# EAGLE board cryptocape-panel-v02 (EAGLE 6.5.0), part 1 of 2
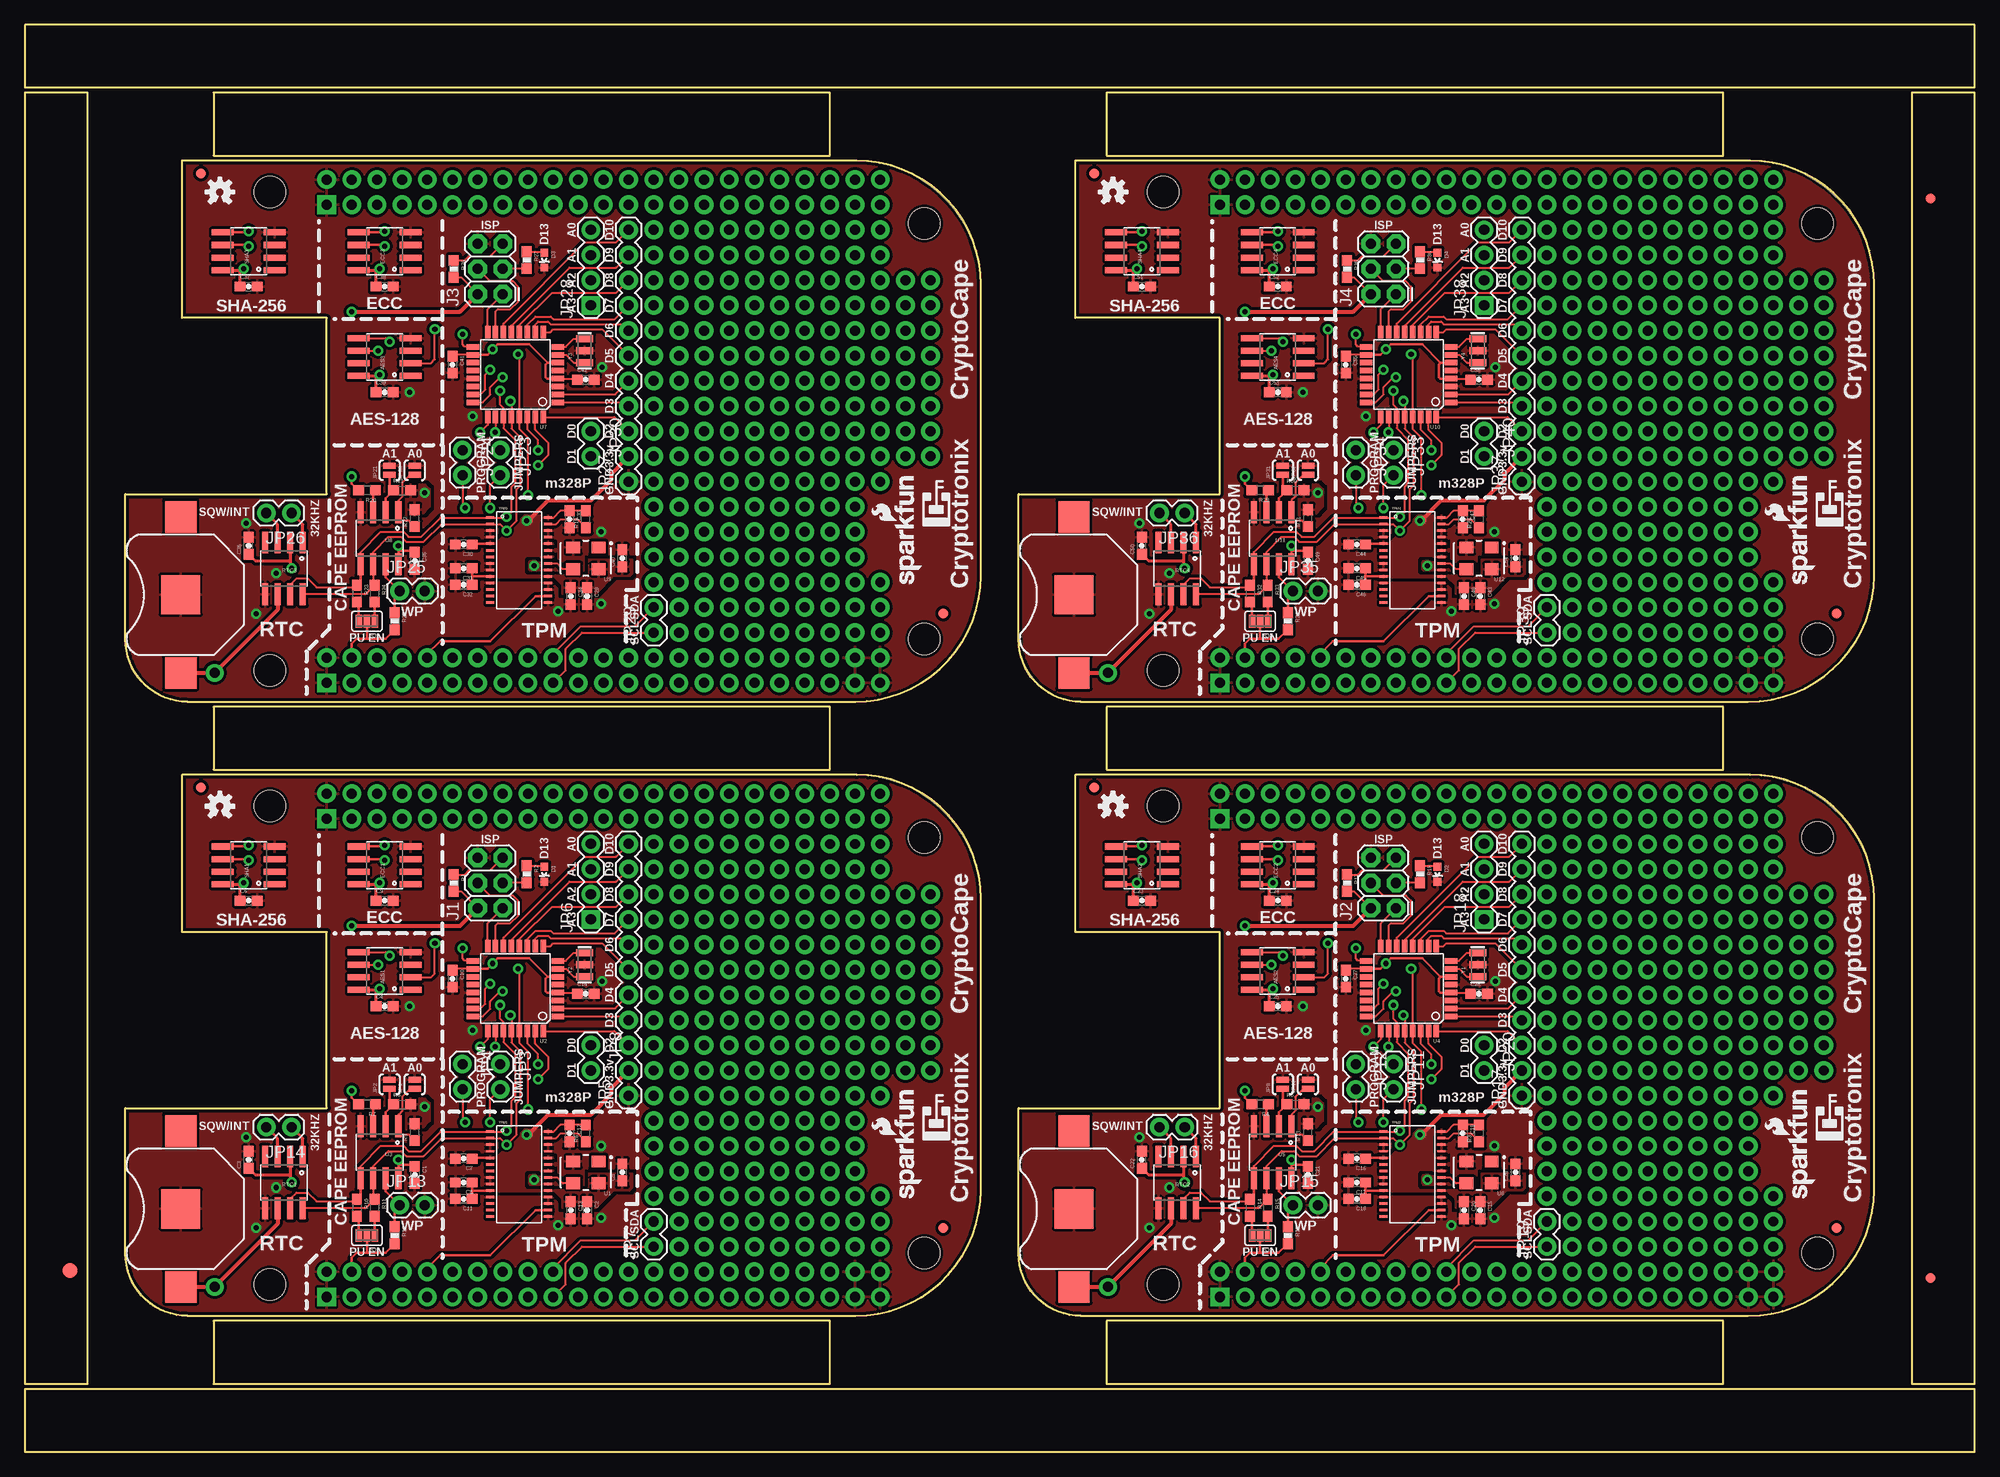
[diagram p0: board, top side]
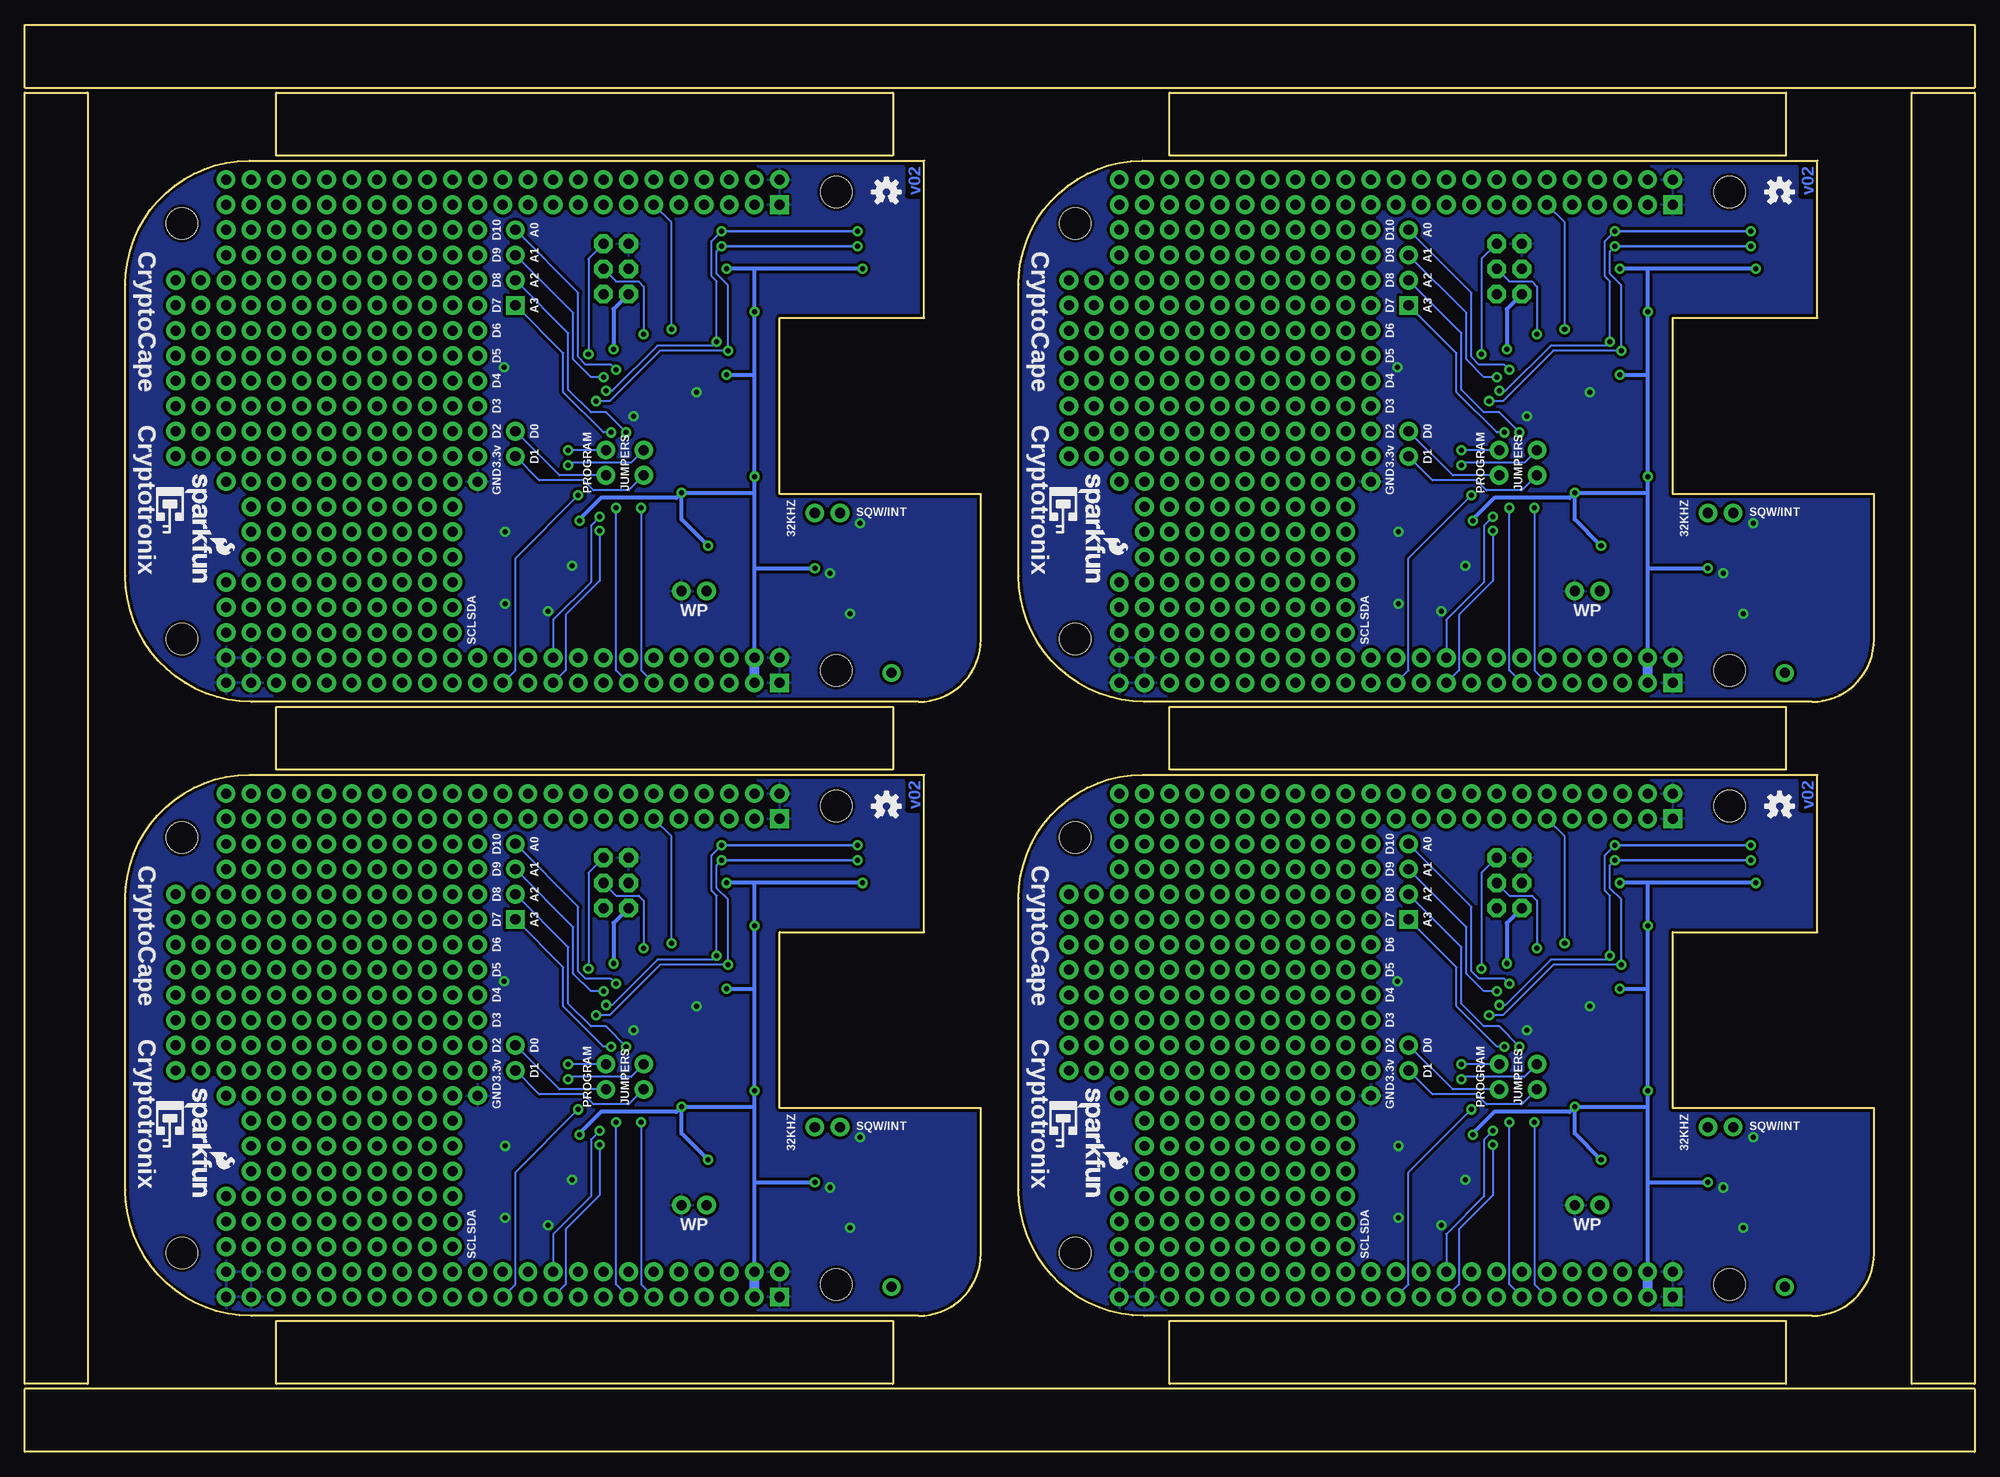
[diagram p1: board, bottom side, seen from below]

Size 196.85 x 144.02 mm. Coordinates in mm from the lower left corner, seen from the top.
Outline: 16.45,13.72 83.82,13.72 arc90 96.52,26.42 96.52,55.82 arc90 84.01,68.33 15.88,68.33 15.88,52.45 30.48,52.45 30.48,34.67 10.16,34.67 10.16,20 arc90 16.45,13.72
Outline: 19.05,6.86 81.28,6.86 81.28,13.21 19.05,13.21 19.05,6.86
Outline: 106.62,13.72 173.99,13.72 arc90 186.69,26.42 186.69,55.82 arc90 174.18,68.33 106.05,68.33 106.05,52.45 120.65,52.45 120.65,34.67 100.33,34.67 100.33,20 arc90 106.62,13.72
Outline: 109.22,6.86 171.45,6.86 171.45,13.21 109.22,13.21 109.22,6.86
Outline: 16.45,75.69 83.82,75.69 arc90 96.52,88.39 96.52,117.79 arc90 84.01,130.3 15.88,130.3 15.88,114.43 30.48,114.43 30.48,96.65 10.16,96.65 10.16,81.98 arc90 16.45,75.69
Outline: 19.05,68.83 81.28,68.83 81.28,75.18 19.05,75.18 19.05,68.83
Outline: 106.62,75.69 173.99,75.69 arc90 186.69,88.39 186.69,117.79 arc90 174.18,130.3 106.05,130.3 106.05,114.43 120.65,114.43 120.65,96.65 100.33,96.65 100.33,81.98 arc90 106.62,75.69
Outline: 109.22,68.83 171.45,68.83 171.45,75.18 109.22,75.18 109.22,68.83
Outline: 6.35,6.86 6.35,137.16 0,137.16 0,6.86 6.35,6.86
Outline: 0,0 196.85,0 196.85,6.35 0,6.35 0,0
Outline: 196.85,6.86 196.85,137.16 190.5,137.16 190.5,6.86 196.85,6.86
Outline: 196.85,144.02 0,144.02 0,137.67 196.85,137.67 196.85,144.02
Outline: 81.28,137.16 19.05,137.16 19.05,130.81 81.28,130.81 81.28,137.16
Outline: 171.45,137.16 109.22,137.16 109.22,130.81 171.45,130.81 171.45,137.16
Copper layers (1*16): Top 0.035mm / dielectric 1.5mm / Bottom 0.035mm
Design rules "SparkFun-2-layer": minimum track width 7mil, minimum drill 15mil, track to track 8mil, track to pad 8mil, pad to pad 8mil, via to via 8mil, smd to smd 8mil, copper to edge 8mil, drill to drill 8mil, minimum pad ring 12mil, minimum via ring 10mil, stop-mask expansion 4mil, vias tented up to drill 20mil, thermal gap 10mil

## Footprints (pad centres in the part's own frame; a part is rotated, then mirrored left to right if it is on the bottom)
SOIC8 = smd 0.61 x 2.21: 1 -1.905,-2.616; 2 -0.635,-2.616; 3 0.635,-2.616; 4 1.905,-2.616; 5 1.905,2.616; 6 0.635,2.616; 7 -0.635,2.616; 8 -1.905,2.616
BATTCON_12MM = smd 3.962 x 3.962: GND 0,0 | smd 3.175 x 3.175: PWR@1 -7.874,0; PWR@2 7.874,0
0603-CAP = smd 1.1 x 1: 1 -0.85,0; 2 0.85,0
LED-0603 = smd 0.8 x 0.8: A 0,-0.75; C 0,0.75
FIDUCIAL-1.5X3 = smd 1.5 x 1.5: 1 0,0
FIDUCIAL-1X2 = smd 1 x 1: 1 0,0
2X3 = drill 1.016 pad 1.88 octagon: 1 0,0; 2 0,2.54; 3 2.54,0; 4 2.54,2.54; 5 5.08,0; 6 5.08,2.54
SJ_2S-NO = smd 0.635 x 1.27: 1 -0.45,0; 2 0.45,0
1X02 = drill 1.016 pad 1.88: 1 0,0; 2 2.54,0
1X11 = drill 1.016 pad 1.88: 1 0,0; 2 2.54,0; 3 5.08,0; 4 7.62,0; 5 10.16,0; 6 12.7,0; 7 15.24,0; 8 17.78,0; 9 20.32,0; 10 22.86,0; 11 25.4,0
1X04 = drill 1.016 pad 1.88 square: 1 0,0 | drill 1.016 pad 1.88: 2 2.54,0; 3 5.08,0; 4 7.62,0
0603-RES = smd 1.1 x 1: 1 -0.85,0; 2 0.85,0
0603 = smd 1.1 x 1: 1 -0.85,0; 2 0.85,0
SJ_3_PASTE1&2&3 = smd 0.635 x 1.27: 1 -0.813,0; 2 0,0; 3 0.813,0
TSSOP28 = smd 0.8 x 0.25: 1 -2.921,4.623; 2 -2.921,3.962; 3 -2.921,3.302; 4 -2.921,2.642; 5 -2.921,1.981; 6 -2.921,1.321; 7 -2.921,0.66; 8 -2.927,0; 9 -2.921,-0.66; 10 -2.921,-1.321; 11 -2.921,-1.981; 12 -2.921,-2.642; 13 -2.921,-3.302; 14 -2.921,-3.962; 15 2.921,-3.962; 16 2.921,-3.302; 17 2.921,-2.642; 18 2.921,-1.981; 19 2.921,-1.321; 20 2.921,-0.66; 21 2.927,0; 22 2.921,0.66; 23 2.921,1.321; 24 2.921,1.981; 25 2.921,2.642; 26 2.921,3.302; 27 2.921,3.962; 28 2.921,4.623
CRYSTAL-OSC-SMD-5X3.2 = smd 1.397 x 1.194: 1 -1.27,-1.1; 2 1.27,-1.1; 3 1.27,1.1; 4 -1.27,1.1
TQFP32-08 = smd 1.27 x 0.559: 1 -4.293,2.8; 2 -4.293,2; 3 -4.293,1.2; 4 -4.293,0.4; 5 -4.293,-0.4; 6 -4.293,-1.2; 7 -4.293,-2; 8 -4.293,-2.8; 17 4.293,-2.8; 18 4.293,-2; 19 4.293,-1.2; 20 4.293,-0.4; 21 4.293,0.4; 22 4.293,1.2; 23 4.293,2; 24 4.293,2.8 | smd 0.559 x 1.27: 9 -2.8,-4.293; 10 -2,-4.293; 11 -1.2,-4.293; 12 -0.4,-4.293; 13 0.4,-4.293; 14 1.2,-4.293; 15 2,-4.293; 16 2.8,-4.293; 25 2.8,4.293; 26 2,4.293; 27 1.2,4.293; 28 0.4,4.293; 29 -0.4,4.293; 30 -1.2,4.293; 31 -2,4.293; 32 -2.8,4.293
SO08 = smd 0.61 x 2.21: 1 -1.905,-2.616; 2 -0.635,-2.616; 3 0.635,-2.616; 4 1.905,-2.616; 5 1.905,2.616; 6 0.635,2.616; 7 -0.635,2.616; 8 -1.905,2.616
BEAGLE_BONE_BLACK_CAPE = drill 1.016 pad 1.88 square: P8.1 20.32,50.165; P9.1 20.32,1.905 | drill 1.016 pad 1.88: P8.2 20.32,52.705; P8.3 22.86,50.165; P8.4 22.86,52.705; P8.5 25.4,50.165; P8.6 25.4,52.705; P8.7 27.94,50.165; P8.8 27.94,52.705; P8.9 30.48,50.165; P8.10 30.48,52.705; P8.11 33.02,50.165; P8.12 33.02,52.705; P8.13 35.56,50.165; P8.14 35.56,52.705; P8.15 38.1,50.165; P8.16 38.1,52.705; P8.17 40.64,50.165; P8.18 40.64,52.705; P8.19 43.18,50.165; P8.20 43.18,52.705; P8.21 45.72,50.165; P8.22 45.72,52.705; P8.23 48.26,50.165; P8.24 48.26,52.705; P8.25 50.8,50.165; P8.26 50.8,52.705; P8.27 53.34,50.165; P8.28 53.34,52.705; P8.29 55.88,50.165; P8.30 55.88,52.705; P8.31 58.42,50.165; P8.32 58.42,52.705; P8.33 60.96,50.165; P8.34 60.96,52.705; P8.35 63.5,50.165; P8.36 63.5,52.705; P8.37 66.04,50.165; P8.38 66.04,52.705; P8.39 68.58,50.165; P8.40 68.58,52.705; P8.41 71.12,50.165; P8.42 71.12,52.705; P8.43 73.66,50.165; P8.44 73.66,52.705; P8.45 76.2,50.165; P8.46 76.2,52.705; P9.2 20.32,4.445; P9.3 22.86,1.905; P9.4 22.86,4.445; P9.5 25.4,1.905; P9.6 25.4,4.445; P9.7 27.94,1.905; P9.8 27.94,4.445; P9.9 30.48,1.905; P9.10 30.48,4.445; P9.11 33.02,1.905; P9.12 33.02,4.445; P9.13 35.56,1.905; P9.14 35.56,4.445; P9.15 38.1,1.905; P9.16 38.1,4.445; P9.17 40.64,1.905; P9.18 40.64,4.445; P9.19 43.18,1.905; P9.20 43.18,4.445; P9.21 45.72,1.905; P9.22 45.72,4.445; P9.23 48.26,1.905; P9.24 48.26,4.445; P9.25 50.8,1.905; P9.26 50.8,4.445; P9.27 53.34,1.905; P9.28 53.34,4.445; P9.29 55.88,1.905; P9.30 55.88,4.445; P9.31 58.42,1.905; P9.32 58.42,4.445; P9.33 60.96,1.905; P9.34 60.96,4.445; P9.35 63.5,1.905; P9.36 63.5,4.445; P9.37 66.04,1.905; P9.38 66.04,4.445; P9.39 68.58,1.905; P9.40 68.58,4.445; P9.41 71.12,1.905; P9.42 71.12,4.445; P9.43 73.66,1.905; P9.44 73.66,4.445; P9.45 76.2,1.905; P9.46 76.2,4.445 | hole 3.175: 14.605,3.175; 80.645,6.35; 80.645,48.26; 14.605,51.435
RESONATOR-SMD = smd 0.7 x 1.7: 1 -1.2,0; 2 0,0; 3 1.2,0

## Placement (x,y rotation side)
AES1  ATAES132  [SOIC8]  36.32,48.51 90 top
AES2  ATAES132  [SOIC8]  126.49,48.51 90 top
AES3  ATAES132  [SOIC8]  36.32,110.49 90 top
AES4  ATAES132  [SOIC8]  126.49,110.49 90 top
BAT1  3V  [BATTCON_12MM]  15.75,24.51 90 top
BAT2  3V  [BATTCON_12MM]  105.92,24.51 90 top
BAT3  3V  [BATTCON_12MM]  15.75,86.49 90 top
BAT4  3V  [BATTCON_12MM]  105.92,86.49 90 top
C1  0.1u  [0603-CAP]  39.37,27.94 270 top
C2  .1uf  [0603-CAP]  56.77,24.38 270 top
C3  0.1uF  [0603-CAP]  22.61,29.46 90 top
C4  0.1uF  [0603-CAP]  36.32,44.96 0 top
C5  .1uf  [0603-CAP]  60.33,28.19 90 top
C6  0.1uF  [0603-CAP]  22.61,55.63 0 top
C7  2200pf  [0603-CAP]  44.32,29.59 180 top
C8  2200pf  [0603-CAP]  44.32,27.18 180 top
C9  0.1uF  [0603-CAP]  36.32,55.63 0 top
C10  0.1uF  [0603-CAP]  43.18,47.75 270 top
C11  .1uf  [0603-CAP]  44.32,25.53 180 top
C12  2200pf  [0603-CAP]  54.99,32.13 270 top
C13  2200pf  [0603-CAP]  55.12,24.38 270 top
C14  0.1uF  [0603-CAP]  56.64,46.23 0 top
C15  .1uf  [0603-CAP]  146.94,24.38 270 top
C16  2200pf  [0603-CAP]  134.49,29.59 180 top
C17  2200pf  [0603-CAP]  134.49,27.18 180 top
C18  .1uf  [0603-CAP]  134.49,25.53 180 top
C19  2200pf  [0603-CAP]  145.16,32.13 270 top
C20  2200pf  [0603-CAP]  145.29,24.38 270 top
C21  0.1u  [0603-CAP]  129.54,27.94 270 top
C22  0.1uF  [0603-CAP]  112.78,29.46 90 top
C23  0.1uF  [0603-CAP]  112.78,55.63 0 top
C24  0.1uF  [0603-CAP]  126.49,55.63 0 top
C25  0.1uF  [0603-CAP]  126.49,44.96 0 top
C26  .1uf  [0603-CAP]  150.5,28.19 90 top
C27  0.1uF  [0603-CAP]  133.35,47.75 270 top
C28  0.1uF  [0603-CAP]  146.81,46.23 0 top
C29  .1uf  [0603-CAP]  56.77,86.36 270 top
C30  2200pf  [0603-CAP]  44.32,91.57 180 top
C31  2200pf  [0603-CAP]  44.32,89.15 180 top
C32  .1uf  [0603-CAP]  44.32,87.5 180 top
C33  2200pf  [0603-CAP]  54.99,94.11 270 top
C34  2200pf  [0603-CAP]  55.12,86.36 270 top
C35  0.1u  [0603-CAP]  39.37,89.92 270 top
C36  0.1uF  [0603-CAP]  22.61,91.44 90 top
C37  0.1uF  [0603-CAP]  22.61,117.6 0 top
C38  0.1uF  [0603-CAP]  36.32,117.6 0 top
C39  0.1uF  [0603-CAP]  36.32,106.93 0 top
C40  .1uf  [0603-CAP]  60.33,90.17 90 top
C41  0.1uF  [0603-CAP]  43.18,109.73 270 top
C42  0.1uF  [0603-CAP]  56.64,108.2 0 top
C43  .1uf  [0603-CAP]  146.94,86.36 270 top
C44  2200pf  [0603-CAP]  134.49,91.57 180 top
C45  2200pf  [0603-CAP]  134.49,89.15 180 top
C46  .1uf  [0603-CAP]  134.49,87.5 180 top
C47  2200pf  [0603-CAP]  145.16,94.11 270 top
C48  2200pf  [0603-CAP]  145.29,86.36 270 top
C49  0.1u  [0603-CAP]  129.54,89.92 270 top
C50  0.1uF  [0603-CAP]  112.78,91.44 90 top
C51  0.1uF  [0603-CAP]  112.78,117.6 0 top
C52  0.1uF  [0603-CAP]  126.49,117.6 0 top
C53  0.1uF  [0603-CAP]  126.49,106.93 0 top
C54  .1uf  [0603-CAP]  150.5,90.17 90 top
C55  0.1uF  [0603-CAP]  133.35,109.73 270 top
C56  0.1uF  [0603-CAP]  146.81,108.2 0 top
D1  GREEN  [LED-0603]  52.45,58.29 180 top
D2  GREEN  [LED-0603]  142.62,58.29 180 top
D3  GREEN  [LED-0603]  52.45,120.27 180 top
D4  GREEN  [LED-0603]  142.62,120.27 180 top
E$1  [FIDUCIAL-1.5X3]  4.57,18.29 0 top
E$12  [FIDUCIAL-1X2]  192.41,17.53 0 top
E$14  [FIDUCIAL-1X2]  192.41,126.49 180 top
ECC1  ATECC108  [SOIC8]  36.32,59.18 90 top
ECC2  ATECC108  [SOIC8]  126.49,59.18 90 top
ECC3  ATECC108  [SOIC8]  36.32,121.16 90 top
ECC4  ATECC108  [SOIC8]  126.49,121.16 90 top
FID1  FIDUCIAL1X2  [FIDUCIAL-1X2]  17.78,67.06 0 top
FID2  FIDUCIAL1X2  [FIDUCIAL-1X2]  92.71,22.61 0 top
FID3  FIDUCIAL1X2  [FIDUCIAL-1X2]  107.95,67.06 0 top
FID4  FIDUCIAL1X2  [FIDUCIAL-1X2]  182.88,22.61 0 top
FID5  FIDUCIAL1X2  [FIDUCIAL-1X2]  17.78,129.03 0 top
FID6  FIDUCIAL1X2  [FIDUCIAL-1X2]  92.71,84.58 0 top
FID7  FIDUCIAL1X2  [FIDUCIAL-1X2]  107.95,129.03 0 top
FID8  FIDUCIAL1X2  [FIDUCIAL-1X2]  182.88,84.58 0 top
J1  AVR_SPI_PRG_6PTH  [2X3]  48.26,54.86 90 top
J2  AVR_SPI_PRG_6PTH  [2X3]  138.43,54.86 90 top
J3  AVR_SPI_PRG_6PTH  [2X3]  48.26,116.84 90 top
J4  AVR_SPI_PRG_6PTH  [2X3]  138.43,116.84 90 top
JP1  Clears A0  [SJ_2S-NO]  39.37,37.08 90 top
JP2  Clears A1  [SJ_2S-NO]  36.83,37.08 90 top
JP3  Serial Program JMP  [1X02]  48.01,39.12 270 top
JP4  Serial Program JMP  [1X02]  44.2,39.12 270 top
JP5  M11PTH  [1X11]  60.96,35.94 90 top
JP6  [1X04]  57.15,53.72 90 top
JP7  M02PTH  [1X02]  63.5,20.7 90 top
JP8  M02PTH  [1X02]  57.15,41.02 270 top
JP9  Clears A1  [SJ_2S-NO]  127,37.08 90 top
JP10  Clears A0  [SJ_2S-NO]  129.54,37.08 90 top
JP11  Serial Program JMP  [1X02]  138.18,39.12 270 top
JP12  Serial Program JMP  [1X02]  134.37,39.12 270 top
JP13  Jump for Read/Write  [1X02]  37.85,24.89 0 top
JP14  [1X02]  26.92,32.77 180 top
JP15  Jump for Read/Write  [1X02]  128.02,24.89 0 top
JP16  [1X02]  117.09,32.77 180 top
JP17  M11PTH  [1X11]  151.13,35.94 90 top
JP18  [1X04]  147.32,53.72 90 top
JP19  M02PTH  [1X02]  153.67,20.7 90 top
JP20  M02PTH  [1X02]  147.32,41.02 270 top
JP21  Clears A1  [SJ_2S-NO]  36.83,99.06 90 top
JP22  Clears A0  [SJ_2S-NO]  39.37,99.06 90 top
JP23  Serial Program JMP  [1X02]  48.01,101.09 270 top
JP24  Serial Program JMP  [1X02]  44.2,101.09 270 top
JP25  Jump for Read/Write  [1X02]  37.85,86.87 0 top
JP26  [1X02]  26.92,94.74 180 top
JP27  M11PTH  [1X11]  60.96,97.92 90 top
JP28  [1X04]  57.15,115.7 90 top
JP29  M02PTH  [1X02]  63.5,82.68 90 top
JP30  M02PTH  [1X02]  57.15,103 270 top
JP31  Clears A1  [SJ_2S-NO]  127,99.06 90 top
JP32  Clears A0  [SJ_2S-NO]  129.54,99.06 90 top
JP33  Serial Program JMP  [1X02]  138.18,101.09 270 top
JP34  Serial Program JMP  [1X02]  134.37,101.09 270 top
JP35  Jump for Read/Write  [1X02]  128.02,86.87 0 top
JP36  [1X02]  117.09,94.74 180 top
JP37  M11PTH  [1X11]  151.13,97.92 90 top
JP38  [1X04]  147.32,115.7 90 top
JP39  M02PTH  [1X02]  153.67,82.68 90 top
JP40  M02PTH  [1X02]  147.32,103 270 top
R1  10k  [0603-RES]  43.31,57.4 270 top
R2  1k  [0603-RES]  50.67,58.29 270 top
R3  4.7K  [0603]  146.81,32.13 90 top
R4  4.7k  [0603]  124.71,35.05 180 top
R5  4.7k  [0603]  128.27,35.05 0 top
R6  4.7K  [0603]  56.64,32.13 90 top
R7  4.7k  [0603]  34.54,35.05 180 top
R8  4.7k  [0603]  38.1,35.05 0 top
R9  4.7k  [0603]  39.37,32.26 90 top
R10  4.7k  [0603]  33.53,24.64 270 top
R11  4.7k  [0603]  35.31,24.64 270 top
R12  10k  [0603-RES]  37.34,21.84 270 top
R13  4.7k  [0603]  129.54,32.26 90 top
R14  4.7k  [0603]  123.7,24.64 270 top
R15  4.7k  [0603]  125.48,24.64 270 top
R16  10k  [0603-RES]  127.51,21.84 270 top
R17  10k  [0603-RES]  133.48,57.4 270 top
R18  1k  [0603-RES]  140.84,58.29 270 top
R19  4.7K  [0603]  56.64,94.11 90 top
R20  4.7k  [0603]  34.54,97.03 180 top
R21  4.7k  [0603]  38.1,97.03 0 top
R22  4.7k  [0603]  39.37,94.23 90 top
R23  4.7k  [0603]  33.53,86.61 270 top
R24  4.7k  [0603]  35.31,86.61 270 top
R25  10k  [0603-RES]  37.34,83.82 270 top
R26  10k  [0603-RES]  43.31,119.38 270 top
R27  1k  [0603-RES]  50.67,120.27 270 top
R28  4.7K  [0603]  146.81,94.11 90 top
R29  4.7k  [0603]  124.71,97.03 180 top
R30  4.7k  [0603]  128.27,97.03 0 top
R31  4.7k  [0603]  129.54,94.23 90 top
R32  4.7k  [0603]  123.7,86.61 270 top
R33  4.7k  [0603]  125.48,86.61 270 top
R34  10k  [0603-RES]  127.51,83.82 270 top
R35  10k  [0603-RES]  133.48,119.38 270 top
R36  1k  [0603-RES]  140.84,120.27 270 top
RTC1  DS3231M  [SOIC8]  26.16,27.18 180 top
RTC2  DS3231M  [SOIC8]  116.33,27.18 180 top
RTC3  DS3231M  [SOIC8]  26.16,89.15 180 top
RTC4  DS3231M  [SOIC8]  116.33,89.15 180 top
SHA1  ATSHA204  [SOIC8]  22.61,59.18 90 top
SHA2  ATSHA204  [SOIC8]  112.78,59.18 90 top
SHA3  ATSHA204  [SOIC8]  22.61,121.16 90 top
SHA4  ATSHA204  [SOIC8]  112.78,121.16 90 top
SJ1  Pull Up Res Jmp  [SJ_3_PASTE1&2&3]  34.54,21.84 180 top
SJ2  Pull Up Res Jmp  [SJ_3_PASTE1&2&3]  124.71,21.84 180 top
SJ3  Pull Up Res Jmp  [SJ_3_PASTE1&2&3]  34.54,83.82 180 top
SJ4  Pull Up Res Jmp  [SJ_3_PASTE1&2&3]  124.71,83.82 180 top
TPM1  AT97SC3204T  [TSSOP28]  49.91,27.69 0 top
TPM2  AT97SC3204T  [TSSOP28]  140.08,27.69 0 top
TPM3  AT97SC3204T  [TSSOP28]  49.91,89.66 0 top
TPM4  AT97SC3204T  [TSSOP28]  140.08,89.66 0 top
U1  33mhz  [CRYSTAL-OSC-SMD-5X3.2]  56.64,28.19 180 top
U2  ATMEGA328P  [TQFP32-08]  49.53,46.74 180 top
U3  EEPROM-I2CSMD  [SO08]  35.81,30.23 180 top
U4  ATMEGA328P  [TQFP32-08]  139.7,46.74 180 top
U5  EEPROM-I2CSMD  [SO08]  125.98,30.23 180 top
U6  33mhz  [CRYSTAL-OSC-SMD-5X3.2]  146.81,28.19 180 top
U7  ATMEGA328P  [TQFP32-08]  49.53,108.71 180 top
U8  EEPROM-I2CSMD  [SO08]  35.81,92.2 180 top
U9  33mhz  [CRYSTAL-OSC-SMD-5X3.2]  56.64,90.17 180 top
U10  ATMEGA328P  [TQFP32-08]  139.7,108.71 180 top
U11  EEPROM-I2CSMD  [SO08]  125.98,92.2 180 top
U12  33mhz  [CRYSTAL-OSC-SMD-5X3.2]  146.81,90.17 180 top
U$1  BEAGLE_BONE_BLACK_CAPE  [BEAGLE_BONE_BLACK_CAPE]  100.33,13.72 0 top
U$2  BEAGLE_BONE_BLACK_CAPE  [BEAGLE_BONE_BLACK_CAPE]  10.16,13.72 0 top
U$3  [OSHW-LOGO-S]  19.68,65.15 0 top
U$4  [SFE_LOGO_NAME_FLAME_.1]  90.68,25.15 90 top
U$5  [SFE_LOGO_NAME_FLAME_.1]  90.68,37.08 270 bottom
U$6  [OSHW-LOGO-S]  19.68,65.15 0 bottom
U$7  [OSHW-LOGO-S]  109.86,65.15 0 top
U$8  [SFE_LOGO_NAME_FLAME_.1]  180.85,25.15 90 top
U$9  [SFE_LOGO_NAME_FLAME_.1]  180.85,37.08 270 bottom
U$10  [OSHW-LOGO-S]  109.86,65.15 0 bottom
U$11  BEAGLE_BONE_BLACK_CAPE  [BEAGLE_BONE_BLACK_CAPE]  10.16,75.69 0 top
U$12  [OSHW-LOGO-S]  19.68,127.13 0 top
U$13  [SFE_LOGO_NAME_FLAME_.1]  90.68,87.12 90 top
U$14  [SFE_LOGO_NAME_FLAME_.1]  90.68,99.06 270 bottom
U$15  [OSHW-LOGO-S]  19.68,127.13 0 bottom
U$16  BEAGLE_BONE_BLACK_CAPE  [BEAGLE_BONE_BLACK_CAPE]  100.33,75.69 0 top
U$17  [OSHW-LOGO-S]  109.86,127.13 0 top
U$18  [SFE_LOGO_NAME_FLAME_.1]  180.85,87.12 90 top
U$19  [SFE_LOGO_NAME_FLAME_.1]  180.85,99.06 270 bottom
U$20  [OSHW-LOGO-S]  109.86,127.13 0 bottom
Y1  8MHZ  [RESONATOR-SMD]  146.69,49.15 90 top
Y2  8MHZ  [RESONATOR-SMD]  56.52,49.15 90 top
Y3  8MHZ  [RESONATOR-SMD]  56.52,111.12 90 top
Y4  8MHZ  [RESONATOR-SMD]  146.69,111.12 90 top

## Library data of the parts
AES1-AES4 ECC1-ECC4 RTC1-RTC4 SHA1-SHA4 TPM1-TPM4 U1 U6 U9 U12 = cryptotronix
BAT1-BAT4 = SparkFun-Electromechanical
C1-C6 C9-C11 C14 C15 C18 C21-C29 C32 C35-C43 C46 C49-C56 = SparkFun-Capacitors; PROD_ID: CAP-00810
C7 C8 C12 C13 C16 C17 C19 C20 C30 C31 C33 C34 C44 C45 C47 C48 = SparkFun-Capacitors; PROD_ID: CAP-07877
D1-D4 = SparkFun-LED; PROD_ID: DIO-00821
E$1 E$12 E$14 FID1-FID8 U$3-U$10 U$12-U$15 U$17-U$20 = SparkFun-Aesthetics
J1-J4 JP5-JP8 JP17-JP20 JP27-JP30 JP37-JP40 = SparkFun-Connectors
JP1-JP4 JP9-JP16 JP21-JP26 JP31-JP36 SJ1-SJ4 = SparkFun-Passives
R1 R12 R16 R17 R25 R26 R34 R35 = SparkFun-Resistors; PROD_ID: RES-00824
R2 R18 R27 R36 = SparkFun-Resistors; PROD_ID: RES-07856
R3-R11 R13-R15 R19-R24 R28-R33 = SparkFun-Resistors; PROD_ID: RES-07857
U2 U4 U7 U10 = SparkFun-DigitalIC; PROD_ID: IC-09069
U3 U5 U8 U11 = SparkFun-DigitalIC
U$1 U$2 U$11 U$16 = SparkFun-Boards
Y1-Y4 = SparkFun-FreqCtrl; PROD_ID: XTAL-08895

## Nets
3.3V: AES1.8 C1.1 C2.1 C3.1 C4.1 C5.1 C6.1 C7.1 C8.1 C9.1 C10.1 C11.1 C12.1 C13.1 C14.1 ECC1.8 J1.2 JP5.2 R1.2 R6.2 R7.2 R8.2 R9.2 R12.2 RTC1.2 SHA1.8 SJ1.2 TPM1.5 TPM1.10 TPM1.19 TPM1.22 TPM1.24 TPM1.28 U1.4 U2.4 U2.6 U2.18 U3.8 U$2.P9.3 U$2.P9.4
3.3V1: AES2.8 C15.1 C16.1 C17.1 C18.1 C19.1 C20.1 C21.1 C22.1 C23.1 C24.1 C25.1 C26.1 C27.1 C28.1 ECC2.8 J2.2 JP17.2 R3.2 R4.2 R5.2 R13.2 R16.2 R17.2 RTC2.2 SHA2.8 SJ2.2 TPM2.5 TPM2.10 TPM2.19 TPM2.22 TPM2.24 TPM2.28 U4.4 U4.6 U4.18 U5.8 U6.4 U$1.P9.3 U$1.P9.4
3.3V2: AES3.8 C29.1 C30.1 C31.1 C32.1 C33.1 C34.1 C35.1 C36.1 C37.1 C38.1 C39.1 C40.1 C41.1 C42.1 ECC3.8 J3.2 JP27.2 R19.2 R20.2 R21.2 R22.2 R25.2 R26.2 RTC3.2 SHA3.8 SJ3.2 TPM3.5 TPM3.10 TPM3.19 TPM3.22 TPM3.24 TPM3.28 U7.4 U7.6 U7.18 U8.8 U9.4 U$11.P9.3 U$11.P9.4
3.3V3: AES4.8 C43.1 C44.1 C45.1 C46.1 C47.1 C48.1 C49.1 C50.1 C51.1 C52.1 C53.1 C54.1 C55.1 C56.1 ECC4.8 J4.2 JP37.2 R28.2 R29.2 R30.2 R31.2 R34.2 R35.2 RTC4.2 SHA4.8 SJ4.2 TPM4.5 TPM4.10 TPM4.19 TPM4.22 TPM4.24 TPM4.28 U10.4 U10.6 U10.18 U11.8 U12.4 U$16.P9.3 U$16.P9.4
32KHZ: JP14.1 RTC1.1
32KHZ1: JP16.1 RTC2.1
32KHZ2: JP26.1 RTC3.1
32KHZ3: JP36.1 RTC4.1
A0: JP6.4 U2.23
A1: JP6.3 U2.24
A2: JP6.2 U2.25
A3: JP6.1 U2.26
A4: JP18.3 U4.24
A5: JP18.2 U4.25
A6: JP18.1 U4.26
A7: JP18.4 U4.23
A8: JP28.3 U7.24
A9: JP28.2 U7.25
A10: JP28.1 U7.26
A11: JP28.4 U7.23
A12: JP38.3 U10.24
A13: JP38.2 U10.25
A14: JP38.1 U10.26
A15: JP38.4 U10.23
AT328P_RST: J1.5 R1.1 U2.29 U$2.P9.23
AT328P_RST1: J2.5 R17.1 U4.29 U$1.P9.23
AT328P_RST2: J3.5 R26.1 U7.29 U$11.P9.23
AT328P_RST3: J4.5 R35.1 U10.29 U$16.P9.23
AUTH0: AES1.2 U$2.P8.11
AUTH1: AES2.2 U$1.P8.11
AUTH2: AES3.2 U$11.P8.11
AUTH3: AES4.2 U$16.P8.11
D0: JP3.2 JP8.1 U$2.P9.13
D0': JP3.1 U2.30
D0'1: JP11.1 U4.30
D0'2: JP23.1 U7.30
D0'3: JP33.1 U10.30
D1: JP4.2 JP8.2 U$2.P9.11
D1': JP4.1 U2.31
D1'1: JP12.1 U4.31
D1'2: JP24.1 U7.31
D1'3: JP34.1 U10.31
D2: JP5.3 U2.32
D3: JP5.4 U2.1
D4: JP5.5 U2.2
D5: JP5.6 U2.9
D6: JP5.7 U2.10
D7: JP5.8 U2.11
D8: JP5.9 U2.12
D9: JP5.10 U2.13
D10: JP5.11 U2.14
D11: JP11.2 JP20.1 U$1.P9.13
D12: JP12.2 JP20.2 U$1.P9.11
D13: JP17.3 U4.32
D14: JP17.4 U4.1
D15: JP17.5 U4.2
D16: JP17.6 U4.9
D17: JP17.7 U4.10
D18: JP17.8 U4.11
D19: JP17.9 U4.12
D20: JP17.10 U4.13
D21: JP17.11 U4.14
D22: JP23.2 JP30.1 U$11.P9.13
D23: JP24.2 JP30.2 U$11.P9.11
D24: JP27.3 U7.32
D25: JP27.4 U7.1
D26: JP27.5 U7.2
D27: JP27.6 U7.9
D28: JP27.7 U7.10
D29: JP27.8 U7.11
D30: JP27.9 U7.12
D31: JP27.10 U7.13
D32: JP27.11 U7.14
D33: JP33.2 JP40.1 U$16.P9.13
D34: JP34.2 JP40.2 U$16.P9.11
D35: JP37.3 U10.32
D36: JP37.4 U10.1
D37: JP37.5 U10.2
D38: JP37.6 U10.9
D39: JP37.7 U10.10
D40: JP37.8 U10.11
D41: JP37.9 U10.12
D42: JP37.10 U10.13
D43: JP37.11 U10.14
GND: AES1.4 BAT1.GND C1.2 C2.2 C3.2 C4.2 C5.2 C6.2 C7.2 C8.2 C9.2 C10.2 C11.2 C12.2 C13.2 C14.2 D1.C ECC1.4 J1.6 JP1.2 JP2.2 JP5.1 JP13.2 RTC1.5 SHA1.4 TPM1.3 TPM1.4 TPM1.8 TPM1.9 TPM1.11 TPM1.15 TPM1.17 TPM1.18 TPM1.20 TPM1.23 TPM1.25 TPM1.26 U1.2 U2.3 U2.5 U2.21 U3.4 U$2.P8.1 U$2.P8.2 U$2.P9.1 U$2.P9.2 U$2.P9.43 U$2.P9.44 U$2.P9.45 U$2.P9.46 Y2.2
GND1: AES2.4 BAT2.GND C15.2 C16.2 C17.2 C18.2 C19.2 C20.2 C21.2 C22.2 C23.2 C24.2 C25.2 C26.2 C27.2 C28.2 D2.C ECC2.4 J2.6 JP9.2 JP10.2 JP15.2 JP17.1 RTC2.5 SHA2.4 TPM2.3 TPM2.4 TPM2.8 TPM2.9 TPM2.11 TPM2.15 TPM2.17 TPM2.18 TPM2.20 TPM2.23 TPM2.25 TPM2.26 U4.3 U4.5 U4.21 U5.4 U6.2 U$1.P8.1 U$1.P8.2 U$1.P9.1 U$1.P9.2 U$1.P9.43 U$1.P9.44 U$1.P9.45 U$1.P9.46 Y1.2
GND2: AES3.4 BAT3.GND C29.2 C30.2 C31.2 C32.2 C33.2 C34.2 C35.2 C36.2 C37.2 C38.2 C39.2 C40.2 C41.2 C42.2 D3.C ECC3.4 J3.6 JP21.2 JP22.2 JP25.2 JP27.1 RTC3.5 SHA3.4 TPM3.3 TPM3.4 TPM3.8 TPM3.9 TPM3.11 TPM3.15 TPM3.17 TPM3.18 TPM3.20 TPM3.23 TPM3.25 TPM3.26 U7.3 U7.5 U7.21 U8.4 U9.2 U$11.P8.1 U$11.P8.2 U$11.P9.1 U$11.P9.2 U$11.P9.43 U$11.P9.44 U$11.P9.45 U$11.P9.46 Y3.2
GND3: AES4.4 BAT4.GND C43.2 C44.2 C45.2 C46.2 C47.2 C48.2 C49.2 C50.2 C51.2 C52.2 C53.2 C54.2 C55.2 C56.2 D4.C ECC4.4 J4.6 JP31.2 JP32.2 JP35.2 JP37.1 RTC4.5 SHA4.4 TPM4.3 TPM4.4 TPM4.8 TPM4.9 TPM4.11 TPM4.15 TPM4.17 TPM4.18 TPM4.20 TPM4.23 TPM4.25 TPM4.26 U10.3 U10.5 U10.21 U11.4 U12.2 U$16.P8.1 U$16.P8.2 U$16.P9.1 U$16.P9.2 U$16.P9.43 U$16.P9.44 U$16.P9.45 U$16.P9.46 Y4.2
I2C2_SCL: AES1.6 ECC1.6 JP7.1 R11.1 RTC1.8 SHA1.6 TPM1.2 U2.28 U3.6 U$2.P9.19
I2C2_SCL1: AES2.6 ECC2.6 JP19.1 R15.1 RTC2.8 SHA2.6 TPM2.2 U4.28 U5.6 U$1.P9.19
I2C2_SCL2: AES3.6 ECC3.6 JP29.1 R24.1 RTC3.8 SHA3.6 TPM3.2 U7.28 U8.6 U$11.P9.19
I2C2_SCL3: AES4.6 ECC4.6 JP39.1 R33.1 RTC4.8 SHA4.6 TPM4.2 U10.28 U11.6 U$16.P9.19
I2C2_SDA: AES1.5 ECC1.5 JP7.2 R10.1 RTC1.7 SHA1.5 TPM1.1 U2.27 U3.5 U$2.P9.20
I2C2_SDA1: AES2.5 ECC2.5 JP19.2 R14.1 RTC2.7 SHA2.5 TPM2.1 U4.27 U5.5 U$1.P9.20
I2C2_SDA2: AES3.5 ECC3.5 JP29.2 R23.1 RTC3.7 SHA3.5 TPM3.1 U7.27 U8.5 U$11.P9.20
I2C2_SDA3: AES4.5 ECC4.5 JP39.2 R32.1 RTC4.7 SHA4.5 TPM4.1 U10.27 U11.5 U$16.P9.20
MISO: J1.1 U2.16
MISO1: J2.1 U4.16
MISO2: J3.1 U7.16
MISO3: J4.1 U10.16
MOSI: J1.4 U2.15
MOSI1: J2.4 U4.15
MOSI2: J3.4 U7.15
MOSI3: J4.4 U10.15
N$1: JP13.1 R12.1 U3.7
N$4: U2.7 Y2.1
N$5: U2.8 Y2.3
N$12: D1.A R2.1
N$18: R7.1 U3.3
N$19: R6.1 TPM1.27
N$20: JP2.1 R8.1 U3.2
N$21: JP1.1 R9.1 U3.1
N$22: R10.2 SJ1.3
N$23: R11.2 SJ1.1
N$27: U4.7 Y1.1
N$28: U4.8 Y1.3
N$29: R3.1 TPM2.27
N$30: R4.1 U5.3
N$31: JP9.1 R5.1 U5.2
N$32: JP10.1 R13.1 U5.1
N$35: R14.2 SJ2.3
N$54: R15.2 SJ2.1
N$55: JP15.1 R16.1 U5.7
N$409: D2.A R18.1
N$410: U7.7 Y3.1
N$411: U7.8 Y3.3
N$412: R19.1 TPM3.27
N$413: R20.1 U8.3
N$414: JP21.1 R21.1 U8.2
N$415: JP22.1 R22.1 U8.1
N$416: R23.2 SJ3.3
N$417: R24.2 SJ3.1
N$418: JP25.1 R25.1 U8.7
N$600: D3.A R27.1
N$601: U10.7 Y4.1
N$602: U10.8 Y4.3
N$603: R28.1 TPM4.27
N$604: R29.1 U11.3
N$605: JP31.1 R30.1 U11.2
N$606: JP32.1 R31.1 U11.1
N$607: R32.2 SJ4.3
N$608: R33.2 SJ4.1
N$609: JP35.1 R34.1 U11.7
N$791: D4.A R36.1
SCK: J1.3 R2.2 U2.17
SCK1: J2.3 R18.2 U4.17
SCK2: J3.3 R27.2 U7.17
SCK3: J4.3 R36.2 U10.17
SQW: JP14.2 RTC1.3
SQW1: JP16.2 RTC2.3
SQW2: JP26.2 RTC3.3
SQW3: JP36.2 RTC4.3
SYS_RESET: TPM1.16 U$2.P9.10
SYS_RESET1: TPM2.16 U$1.P9.10
SYS_RESET2: TPM3.16 U$11.P9.10
SYS_RESET3: TPM4.16 U$16.P9.10
TPM_CLK: TPM1.21 U1.3
TPM_CLK1: TPM2.21 U6.3
TPM_CLK2: TPM3.21 U9.3
TPM_CLK3: TPM4.21 U12.3
VBAT: BAT1.PWR@1 RTC1.6
VBAT1: BAT2.PWR@1 RTC2.6
VBAT2: BAT3.PWR@1 RTC3.6
VBAT3: BAT4.PWR@1 RTC4.6

## Tracks (layer width: path | path; a pad name or v marks a point on that pad's centre or on a via)
3.3V  (via drill 0.51)
  Top 0.203: TPM1.28 53.39,32.31 54.06,32.98 C12.1 R6.2 | U2.18 43.31,48.74 C10.1 | U2.4 55.35,46.34 C14.1 | R1.2 44.03,56.55 J1.2
  Top 0.254: R12.2 36.41,20.07 34.54,20.07 | SJ1.2 34.54,20.07 | U$2.P9.4 33.02,19.56 33.53,20.07 34.54,20.07 | U3.8 37.72,28.96 | 37.72,28.96 v37.72,29.46 | C1.1 39.2,28.96 37.72,28.96 | R7.2 33.02,35.73 v33.02,36.45 | C8.1 45.17,26.36 | 45.17,26.36 C11.1 | TPM1.10 45.17,26.36 | TPM1.5 45.3,29.67 C7.1 | U2.4 52.72,46.34 52.58,46.48 52.58,47.75 52.76,47.94 | U2.6 52.76,47.94 | 52.76,47.94 50.91,49.78 47.75,49.78 v47.24,49.28 46.7,48.74 U2.18
  Top 0.305: RTC1.2 26.8,27.94 | 26.8,27.94 26.8,27.18 v26.92,27.18 | C3.1 23.28,27.94 26.8,27.94 | AES1.8 35.69,46.61 v35.81,46.74 35.47,46.39 C4.1 | ECC1.8 35.69,57.28 | 35.69,57.28 v35.81,57.4 | C9.1 35.47,57.06 35.69,57.28 | SHA1.8 21.97,57.28 v22.1,57.4 21.76,57.06 C6.1
  Top 0.406: v33.02,53.09 43.94,53.09 J1.2 | 50.8,32 52.83,34.04 57.15,34.04 59.18,36.07 59.18,36.7 JP5.2
  Top 1.016: v50.67,32 50.8,32
  Bottom 0.406: U$2.P9.4 33.02,27.18 | 33.02,27.18 v26.92,27.18 | 33.02,27.18 33.02,34.8 | 33.02,34.8 v33.02,36.45 33.02,46.74 | v37.72,29.46 40.39,32.13 v40.39,34.8 | v40.39,34.8 33.02,34.8 | 50.67,32.26 v50.67,32 50.67,32.13 48.51,34.29 40.89,34.29 v40.39,34.8 | 33.02,46.74 v33.02,53.09 33.02,57.4 | v22.1,57.4 33.02,57.4 | 33.02,57.4 v35.81,57.4 | v35.81,46.74 33.02,46.74 | J1.2 47.24,53.34 v47.24,49.28
  Bottom 1.016: U$2.P9.3 U$2.P9.4
  pour Top: 38.48,35.69 40.39,35.69 40.89,35.18 40.89,33.4 40.01,32.51 38.48,32.51
  pour Top: 46.48,29.84 46.48,29.59 47.75,29.59 47.75,26.42 46.48,26.42 46.48,26.29 53.47,26.29 54.23,25.53 54.23,24.64 57.66,24.64 59.44,26.42 61.09,26.42 61.34,26.67 61.34,28.07 56.9,28.07 56.9,26.42 50.67,26.42 50.42,26.67 50.42,28.19 50.67,28.45 51.94,28.45 52.07,28.32 53.34,28.32 53.34,28.45 52.07,28.45 52.07,29.59 53.34,29.59 53.34,29.84 52.2,29.84 51.94,30.1 51.94,31.88 52.2,32.13 53.34,32.13 53.34,32.51 50.42,32.51 47.75,29.84
3.3V1  (via drill 0.51)
  Top 0.203: TPM2.28 143.56,32.31 144.23,32.98 C19.1 R3.2 | U4.18 133.48,48.74 C27.1 | U4.4 145.52,46.34 C28.1 | R17.2 134.2,56.55 J2.2
  Top 0.254: R16.2 126.58,20.07 124.71,20.07 | SJ2.2 124.71,20.07 | U$1.P9.4 123.19,19.56 123.7,20.07 124.71,20.07 | U5.8 127.89,28.96 | 127.89,28.96 v127.89,29.46 | C21.1 129.37,28.96 127.89,28.96 | R4.2 123.19,35.73 v123.19,36.45 | C17.1 135.34,26.36 | 135.34,26.36 C18.1 | TPM2.10 135.34,26.36 | TPM2.5 135.47,29.67 C16.1 | U4.4 142.89,46.34 142.75,46.48 142.75,47.75 142.93,47.94 | U4.6 142.93,47.94 | 142.93,47.94 141.08,49.78 137.92,49.78 v137.41,49.28 136.87,48.74 U4.18
  Top 0.305: RTC2.2 116.97,27.94 | 116.97,27.94 116.97,27.18 v117.09,27.18 | C22.1 113.45,27.94 116.97,27.94 | AES2.8 125.86,46.61 v125.98,46.74 125.64,46.39 C25.1 | ECC2.8 125.86,57.28 | 125.86,57.28 v125.98,57.4 | C24.1 125.64,57.06 125.86,57.28 | SHA2.8 112.14,57.28 v112.27,57.4 111.93,57.06 C23.1
  Top 0.406: v123.19,53.09 134.11,53.09 J2.2 | 140.97,32 143,34.04 147.32,34.04 149.35,36.07 149.35,36.7 JP17.2
  Top 1.016: v140.84,32 140.97,32
  Bottom 0.406: U$1.P9.4 123.19,27.18 | 123.19,27.18 v117.09,27.18 | 123.19,27.18 123.19,34.8 | 123.19,34.8 v123.19,36.45 123.19,46.74 | v127.89,29.46 130.56,32.13 v130.56,34.8 | v130.56,34.8 123.19,34.8 | 140.84,32.26 v140.84,32 140.84,32.13 138.68,34.29 131.06,34.29 v130.56,34.8 | 123.19,46.74 v123.19,53.09 123.19,57.4 | v112.27,57.4 123.19,57.4 | 123.19,57.4 v125.98,57.4 | v125.98,46.74 123.19,46.74 | J2.2 137.41,53.34 v137.41,49.28
  Bottom 1.016: U$1.P9.3 U$1.P9.4
  pour Top: 128.65,35.69 130.56,35.69 131.06,35.18 131.06,33.4 130.18,32.51 128.65,32.51
  pour Top: 136.65,29.84 136.65,29.59 137.92,29.59 137.92,26.42 136.65,26.42 136.65,26.29 143.64,26.29 144.4,25.53 144.4,24.64 147.83,24.64 149.61,26.42 151.26,26.42 151.51,26.67 151.51,28.07 147.07,28.07 147.07,26.42 140.84,26.42 140.59,26.67 140.59,28.19 140.84,28.45 142.11,28.45 142.24,28.32 143.51,28.32 143.51,28.45 142.24,28.45 142.24,29.59 143.51,29.59 143.51,29.84 142.37,29.84 142.11,30.1 142.11,31.88 142.37,32.13 143.51,32.13 143.51,32.51 140.59,32.51 137.92,29.84
3.3V2  (via drill 0.51)
  Top 0.203: TPM3.28 53.39,94.28 54.06,94.96 C33.1 R19.2 | U7.18 43.31,110.71 C41.1 | U7.4 55.35,108.31 C42.1 | R26.2 44.03,118.53 J3.2
  Top 0.254: R25.2 36.41,82.04 34.54,82.04 | SJ3.2 34.54,82.04 | U$11.P9.4 33.02,81.53 33.53,82.04 34.54,82.04 | U8.8 37.72,90.93 | 37.72,90.93 v37.72,91.44 | C35.1 39.2,90.93 37.72,90.93 | R20.2 33.02,97.7 v33.02,98.42 | C31.1 45.17,88.34 | 45.17,88.34 C32.1 | TPM3.10 45.17,88.34 | TPM3.5 45.3,91.64 C30.1 | U7.4 52.72,108.31 52.58,108.46 52.58,109.73 52.76,109.91 | U7.6 52.76,109.91 | 52.76,109.91 50.91,111.76 47.75,111.76 v47.24,111.25 46.7,110.71 U7.18
  Top 0.305: RTC3.2 26.8,89.92 | 26.8,89.92 26.8,89.15 v26.92,89.15 | C36.1 23.28,89.92 26.8,89.92 | AES3.8 35.69,108.58 v35.81,108.71 35.47,108.37 C39.1 | ECC3.8 35.69,119.25 | 35.69,119.25 v35.81,119.38 | C38.1 35.47,119.04 35.69,119.25 | SHA3.8 21.97,119.25 v22.1,119.38 21.76,119.04 C37.1
  Top 0.406: v33.02,115.06 43.94,115.06 J3.2 | 50.8,93.98 52.83,96.01 57.15,96.01 59.18,98.04 59.18,98.68 JP27.2
  Top 1.016: v50.67,93.98 50.8,93.98
  Bottom 0.406: U$11.P9.4 33.02,89.15 | 33.02,89.15 v26.92,89.15 | 33.02,89.15 33.02,96.77 | 33.02,96.77 v33.02,98.42 33.02,108.71 | v37.72,91.44 40.39,94.11 v40.39,96.77 | v40.39,96.77 33.02,96.77 | 50.67,94.23 v50.67,93.98 50.67,94.11 48.51,96.27 40.89,96.27 v40.39,96.77 | 33.02,108.71 v33.02,115.06 33.02,119.38 | v22.1,119.38 33.02,119.38 | 33.02,119.38 v35.81,119.38 | v35.81,108.71 33.02,108.71 | J3.2 47.24,115.32 v47.24,111.25
  Bottom 1.016: U$11.P9.3 U$11.P9.4
  pour Top: 38.48,97.66 40.39,97.66 40.89,97.16 40.89,95.38 40.01,94.49 38.48,94.49
  pour Top: 46.48,91.82 46.48,91.57 47.75,91.57 47.75,88.39 46.48,88.39 46.48,88.27 53.47,88.27 54.23,87.5 54.23,86.61 57.66,86.61 59.44,88.39 61.09,88.39 61.34,88.65 61.34,90.04 56.9,90.04 56.9,88.39 50.67,88.39 50.42,88.65 50.42,90.17 50.67,90.42 51.94,90.42 52.07,90.3 53.34,90.3 53.34,90.42 52.07,90.42 52.07,91.57 53.34,91.57 53.34,91.82 52.2,91.82 51.94,92.08 51.94,93.85 52.2,94.11 53.34,94.11 53.34,94.49 50.42,94.49 47.75,91.82
3.3V3  (via drill 0.51)
  Top 0.203: TPM4.28 143.56,94.28 144.23,94.96 C47.1 R28.2 | U10.18 133.48,110.71 C55.1 | U10.4 145.52,108.31 C56.1 | R35.2 134.2,118.53 J4.2
  Top 0.254: R34.2 126.58,82.04 124.71,82.04 | SJ4.2 124.71,82.04 | U$16.P9.4 123.19,81.53 123.7,82.04 124.71,82.04 | U11.8 127.89,90.93 | 127.89,90.93 v127.89,91.44 | C49.1 129.37,90.93 127.89,90.93 | R29.2 123.19,97.7 v123.19,98.42 | C45.1 135.34,88.34 | 135.34,88.34 C46.1 | TPM4.10 135.34,88.34 | TPM4.5 135.47,91.64 C44.1 | U10.4 142.89,108.31 142.75,108.46 142.75,109.73 142.93,109.91 | U10.6 142.93,109.91 | 142.93,109.91 141.08,111.76 137.92,111.76 v137.41,111.25 136.87,110.71 U10.18
  Top 0.305: RTC4.2 116.97,89.92 | 116.97,89.92 116.97,89.15 v117.09,89.15 | C50.1 113.45,89.92 116.97,89.92 | AES4.8 125.86,108.58 v125.98,108.71 125.64,108.37 C53.1 | ECC4.8 125.86,119.25 | 125.86,119.25 v125.98,119.38 | C52.1 125.64,119.04 125.86,119.25 | SHA4.8 112.14,119.25 v112.27,119.38 111.93,119.04 C51.1
  Top 0.406: v123.19,115.06 134.11,115.06 J4.2 | 140.97,93.98 143,96.01 147.32,96.01 149.35,98.04 149.35,98.68 JP37.2
  Top 1.016: v140.84,93.98 140.97,93.98
  Bottom 0.406: U$16.P9.4 123.19,89.15 | 123.19,89.15 v117.09,89.15 | 123.19,89.15 123.19,96.77 | 123.19,96.77 v123.19,98.42 123.19,108.71 | v127.89,91.44 130.56,94.11 v130.56,96.77 | v130.56,96.77 123.19,96.77 | 140.84,94.23 v140.84,93.98 140.84,94.11 138.68,96.27 131.06,96.27 v130.56,96.77 | 123.19,108.71 v123.19,115.06 123.19,119.38 | v112.27,119.38 123.19,119.38 | 123.19,119.38 v125.98,119.38 | v125.98,108.71 123.19,108.71 | J4.2 137.41,115.32 v137.41,111.25
  Bottom 1.016: U$16.P9.3 U$16.P9.4
  pour Top: 128.65,97.66 130.56,97.66 131.06,97.16 131.06,95.38 130.18,94.49 128.65,94.49
  pour Top: 136.65,91.82 136.65,91.57 137.92,91.57 137.92,88.39 136.65,88.39 136.65,88.27 143.64,88.27 144.4,87.5 144.4,86.61 147.83,86.61 149.61,88.39 151.26,88.39 151.51,88.65 151.51,90.04 147.07,90.04 147.07,88.39 140.84,88.39 140.59,88.65 140.59,90.17 140.84,90.42 142.11,90.42 142.24,90.3 143.51,90.3 143.51,90.42 142.24,90.42 142.24,91.57 143.51,91.57 143.51,91.82 142.37,91.82 142.11,92.08 142.11,93.85 142.37,94.11 143.51,94.11 143.51,94.49 140.59,94.49 137.92,91.82
32KHZ
  Top 0.305: RTC1.1 28.07,31.62 JP14.1
32KHZ1
  Top 0.305: RTC2.1 118.24,31.62 JP16.1
32KHZ2
  Top 0.305: RTC3.1 28.07,93.6 JP26.1
32KHZ3
  Top 0.305: RTC4.1 118.24,93.6 JP36.1
A0  (via drill 0.51)
  Top 0.203: U2.23 46.01,44.74 46.48,45.21 46.48,46.74 v46.99,47.24
  Bottom 0.203: v46.99,47.24 47.5,47.75 50.04,47.75 50.8,48.51 50.8,54.99 JP6.4
A1  (via drill 0.51)
  Top 0.203: U2.24 46.22,43.94 46.99,44.7 46.99,45.47 48.01,46.48 v48.26,46.48
  Bottom 0.203: v48.26,46.48 49.53,46.48 51.31,48.26 51.31,52.96 JP6.3
A2  (via drill 0.51)
  Top 0.203: U2.25 46.73,41.65 v45.97,40.89
  Bottom 0.203: v45.97,40.89 48.01,42.93 49.53,42.93 51.82,45.21 51.82,50.93 JP6.2
A3  (via drill 0.51)
  Top 0.203: U2.26 47.53,40.93 v47.5,40.89
  Bottom 0.203: v47.5,40.89 48.26,40.89 52.32,44.96 52.32,48.9 JP6.1
A4  (via drill 0.51)
  Top 0.203: U4.24 136.39,43.94 137.16,44.7 137.16,45.47 138.18,46.48 v138.43,46.48
  Bottom 0.203: v138.43,46.48 139.7,46.48 141.48,48.26 141.48,52.96 JP18.3
A5  (via drill 0.51)
  Top 0.203: U4.25 136.9,41.65 v136.14,40.89
  Bottom 0.203: v136.14,40.89 138.18,42.93 139.7,42.93 141.99,45.21 141.99,50.93 JP18.2
A6  (via drill 0.51)
  Top 0.203: U4.26 137.7,40.93 v137.67,40.89
  Bottom 0.203: v137.67,40.89 138.43,40.89 142.49,44.96 142.49,48.9 JP18.1
A7  (via drill 0.51)
  Top 0.203: U4.23 136.18,44.74 136.65,45.21 136.65,46.74 v137.16,47.24
  Bottom 0.203: v137.16,47.24 137.67,47.75 140.21,47.75 140.97,48.51 140.97,54.99 JP18.4
A8  (via drill 0.51)
  Top 0.203: U7.24 46.22,105.91 46.99,106.68 46.99,107.44 48.01,108.46 v48.26,108.46
  Bottom 0.203: v48.26,108.46 49.53,108.46 51.31,110.24 51.31,114.94 JP28.3
A9  (via drill 0.51)
  Top 0.203: U7.25 46.73,103.63 v45.97,102.87
  Bottom 0.203: v45.97,102.87 48.01,104.9 49.53,104.9 51.82,107.19 51.82,112.9 JP28.2
A10  (via drill 0.51)
  Top 0.203: U7.26 47.53,102.9 v47.5,102.87
  Bottom 0.203: v47.5,102.87 48.26,102.87 52.32,106.93 52.32,110.87 JP28.1
A11  (via drill 0.51)
  Top 0.203: U7.23 46.01,106.71 46.48,107.19 46.48,108.71 v46.99,109.22
  Bottom 0.203: v46.99,109.22 47.5,109.73 50.04,109.73 50.8,110.49 50.8,116.97 JP28.4
A12  (via drill 0.51)
  Top 0.203: U10.24 136.39,105.91 137.16,106.68 137.16,107.44 138.18,108.46 v138.43,108.46
  Bottom 0.203: v138.43,108.46 139.7,108.46 141.48,110.24 141.48,114.94 JP38.3
A13  (via drill 0.51)
  Top 0.203: U10.25 136.9,103.63 v136.14,102.87
  Bottom 0.203: v136.14,102.87 138.18,104.9 139.7,104.9 141.99,107.19 141.99,112.9 JP38.2
A14  (via drill 0.51)
  Top 0.203: U10.26 137.7,102.9 v137.67,102.87
  Bottom 0.203: v137.67,102.87 138.43,102.87 142.49,106.93 142.49,110.87 JP38.1
A15  (via drill 0.51)
  Top 0.203: U10.23 136.18,106.71 136.65,107.19 136.65,108.71 v137.16,109.22
  Bottom 0.203: v137.16,109.22 137.67,109.73 140.21,109.73 140.97,110.49 140.97,116.97 JP38.4
AT328P_RST  (via drill 0.51)
  Top 0.203: v49.78,48.77 49.93,48.62 U2.29 49.93,41.26 50.8,40.39 v50.8,34.54 | R1.1 44.41,58.25 44.83,58.67 46.99,58.67 J1.5
  Bottom 0.203: U$2.P9.23 57.15,16.89 57.15,28.19 v50.8,34.54 | J1.5 49.78,58.42 v49.78,48.77
AT328P_RST1  (via drill 0.51)
  Top 0.203: v139.95,48.77 140.1,48.62 U4.29 140.1,41.26 140.97,40.39 v140.97,34.54 | R17.1 134.58,58.25 135,58.67 137.16,58.67 J2.5
  Bottom 0.203: U$1.P9.23 147.32,16.89 147.32,28.19 v140.97,34.54 | J2.5 139.95,58.42 v139.95,48.77
AT328P_RST2  (via drill 0.51)
  Top 0.203: v49.78,110.74 49.93,110.6 U7.29 49.93,103.23 50.8,102.36 v50.8,96.52 | R26.1 44.41,120.23 44.83,120.65 46.99,120.65 J3.5
  Bottom 0.203: U$11.P9.23 57.15,78.87 57.15,90.17 v50.8,96.52 | J3.5 49.78,120.4 v49.78,110.74
AT328P_RST3  (via drill 0.51)
  Top 0.203: v139.95,110.74 140.1,110.6 U10.29 140.1,103.23 140.97,102.36 v140.97,96.52 | R35.1 134.58,120.23 135,120.65 137.16,120.65 J4.5
  Bottom 0.203: U$16.P9.23 147.32,78.87 147.32,90.17 v140.97,96.52 | J4.5 139.95,120.4 v139.95,110.74
AUTH0  (via drill 0.51)
  Top 0.203: AES1.2 41.02,47.88 41.4,48.26 v41.4,51.31
  Bottom 0.203: v41.4,51.31 41.4,62.1 U$2.P8.11
AUTH1  (via drill 0.51)
  Top 0.203: AES2.2 131.19,47.88 131.57,48.26 v131.57,51.31
  Bottom 0.203: v131.57,51.31 131.57,62.1 U$1.P8.11
AUTH2  (via drill 0.51)
  Top 0.203: AES3.2 41.02,109.86 41.4,110.24 v41.4,113.28
  Bottom 0.203: v41.4,113.28 41.4,124.08 U$11.P8.11
AUTH3  (via drill 0.51)
  Top 0.203: AES4.2 131.19,109.86 131.57,110.24 v131.57,113.28
  Bottom 0.203: v131.57,113.28 131.57,124.08 U$16.P8.11
D0  (via drill 0.51)
  Top 0.203: v46.99,33.27 46.99,35.56 JP3.2
  Bottom 0.203: U$2.P9.13 46.99,16.89 v46.99,33.27 | JP3.2 52.7,36.58 JP8.1
D0'  (via drill 0.51)
  Top 0.203: v51.82,39.12 51.82,40.13 50.73,41.22 U2.30
  Bottom 0.203: JP3.1 v51.82,39.12
D0'1  (via drill 0.51)
  Top 0.203: v141.99,39.12 141.99,40.13 140.9,41.22 U4.30
  Bottom 0.203: JP11.1 v141.99,39.12
D0'2  (via drill 0.51)
  Top 0.203: v51.82,101.09 51.82,102.11 50.73,103.19 U7.30
  Bottom 0.203: JP23.1 v51.82,101.09
D0'3  (via drill 0.51)
  Top 0.203: v141.99,101.09 141.99,102.11 140.9,103.19 U10.30
  Bottom 0.203: JP33.1 v141.99,101.09
D1  (via drill 0.51)
  Top 0.203: JP4.2 44.2,33.53 v44.45,33.27
  Bottom 0.203: v44.45,33.27 44.45,16.89 U$2.P9.11 | JP4.2 45.72,35.05 49.28,35.05 50.29,36.07 54.74,36.07 JP8.2
D1'  (via drill 0.51)
  Top 0.203: U2.31 51.53,41.18 52.83,39.88 52.83,38.61 v51.82,37.59
  Bottom 0.203: JP4.1 45.47,37.85 51.56,37.85 v51.82,37.59
D1'1  (via drill 0.51)
  Top 0.203: U4.31 141.7,41.18 143,39.88 143,38.61 v141.99,37.59
  Bottom 0.203: JP12.1 135.64,37.85 141.73,37.85 v141.99,37.59
D1'2  (via drill 0.51)
  Top 0.203: U7.31 51.53,103.16 52.83,101.85 52.83,100.58 v51.82,99.57
  Bottom 0.203: JP24.1 45.47,99.82 51.56,99.82 v51.82,99.57
D1'3  (via drill 0.51)
  Top 0.203: U10.31 141.7,103.16 143,101.85 143,100.58 v141.99,99.57
  Bottom 0.203: JP34.1 135.64,99.82 141.73,99.82 v141.99,99.57
D2
  Top 0.203: U2.32 59.54,42.44 JP5.3
D3
  Top 0.203: U2.1 60.59,43.94 JP5.4
D4
  Top 0.203: U2.2 59.59,44.74 JP5.5
D5
  Top 0.203: U2.9 53.06,51.03 53.34,51.31 58.29,51.31 JP5.6
D6
  Top 0.203: U2.10 51.53,51.78 51.82,52.07 52.83,52.07 53.09,51.82 60.33,51.82 JP5.7
D7
  Top 0.203: U2.11 50.73,51.75 51.56,52.58 53.09,52.58 53.34,52.32 59.56,52.32 JP5.8
D8
  Top 0.203: U2.12 49.93,51.71 53.21,54.99 59.69,54.99 JP5.9
D9
  Top 0.203: U2.13 49.13,51.67 54.99,57.53 59.69,57.53 JP5.10
D10
  Top 0.203: U2.14 48.33,51.89 56.52,60.07 59.69,60.07 JP5.11
D11  (via drill 0.51)
  Top 0.203: v137.16,33.27 137.16,35.56 JP11.2
  Bottom 0.203: U$1.P9.13 137.16,16.89 v137.16,33.27 | JP11.2 142.88,36.58 JP20.1
D12  (via drill 0.51)
  Top 0.203: JP12.2 134.37,33.53 v134.62,33.27
  Bottom 0.203: v134.62,33.27 134.62,16.89 U$1.P9.11 | JP12.2 135.89,35.05 139.45,35.05 140.46,36.07 144.91,36.07 JP20.2
D13
  Top 0.203: U4.32 149.71,42.44 JP17.3
D14
  Top 0.203: U4.1 150.75,43.94 JP17.4
D15
  Top 0.203: U4.2 149.76,44.74 JP17.5
D16
  Top 0.203: U4.9 143.23,51.03 143.51,51.31 148.46,51.31 JP17.6
D17
  Top 0.203: U4.10 141.7,51.78 141.99,52.07 143,52.07 143.26,51.82 150.5,51.82 JP17.7
D18
  Top 0.203: U4.11 140.9,51.75 141.73,52.58 143.26,52.58 143.51,52.32 149.73,52.32 JP17.8
D19
  Top 0.203: U4.12 140.1,51.71 143.38,54.99 149.86,54.99 JP17.9
D20
  Top 0.203: U4.13 139.3,51.67 145.16,57.53 149.86,57.53 JP17.10
D21
  Top 0.203: U4.14 138.5,51.89 146.69,60.07 149.86,60.07 JP17.11
D22  (via drill 0.51)
  Top 0.203: v46.99,95.25 46.99,97.54 JP23.2
  Bottom 0.203: U$11.P9.13 46.99,78.87 v46.99,95.25 | JP23.2 52.7,98.55 JP30.1
D23  (via drill 0.51)
  Top 0.203: JP24.2 44.2,95.5 v44.45,95.25
  Bottom 0.203: v44.45,95.25 44.45,78.87 U$11.P9.11 | JP24.2 45.72,97.03 49.28,97.03 50.29,98.04 54.74,98.04 JP30.2
D24
  Top 0.203: U7.32 59.54,104.42 JP27.3
D25
  Top 0.203: U7.1 60.59,105.91 JP27.4
D26
  Top 0.203: U7.2 59.59,106.71 JP27.5
D27
  Top 0.203: U7.9 53.06,113 53.34,113.28 58.29,113.28 JP27.6
D28
  Top 0.203: U7.10 51.53,113.76 51.82,114.05 52.83,114.05 53.09,113.79 60.33,113.79 JP27.7
D29
  Top 0.203: U7.11 50.73,113.72 51.56,114.55 53.09,114.55 53.34,114.3 59.56,114.3 JP27.8
D30
  Top 0.203: U7.12 49.93,113.68 53.21,116.97 59.69,116.97 JP27.9
D31
  Top 0.203: U7.13 49.13,113.65 54.99,119.51 59.69,119.51 JP27.10
D32
  Top 0.203: U7.14 48.33,113.86 56.52,122.05 59.69,122.05 JP27.11
D33  (via drill 0.51)
  Top 0.203: v137.16,95.25 137.16,97.54 JP33.2
  Bottom 0.203: U$16.P9.13 137.16,78.87 v137.16,95.25 | JP33.2 142.88,98.55 JP40.1
D34  (via drill 0.51)
  Top 0.203: JP34.2 134.37,95.5 v134.62,95.25
  Bottom 0.203: v134.62,95.25 134.62,78.87 U$16.P9.11 | JP34.2 135.89,97.03 139.45,97.03 140.46,98.04 144.91,98.04 JP40.2
D35
  Top 0.203: U10.32 149.71,104.42 JP37.3
D36
  Top 0.203: U10.1 150.75,105.91 JP37.4
D37
  Top 0.203: U10.2 149.76,106.71 JP37.5
D38
  Top 0.203: U10.9 143.23,113 143.51,113.28 148.46,113.28 JP37.6
D39
  Top 0.203: U10.10 141.7,113.76 141.99,114.05 143,114.05 143.26,113.79 150.5,113.79 JP37.7
D40
  Top 0.203: U10.11 140.9,113.72 141.73,114.55 143.26,114.55 143.51,114.3 149.73,114.3 JP37.8
D41
  Top 0.203: U10.12 140.1,113.68 143.38,116.97 149.86,116.97 JP37.9
D42
  Top 0.203: U10.13 139.3,113.65 145.16,119.51 149.86,119.51 JP37.10
D43
  Top 0.203: U10.14 138.5,113.86 146.69,122.05 149.86,122.05 JP37.11
GND  (via drill 0.51)
  other vias: 51.44,27.43 25.4,26.67 22.35,31.75 23.37,22.61 53.85,22.86 58.29,47.5 58.17,30.86 58.17,23.62 45.21,42.55 38.86,44.96
  pour Top (isolate 0.305, rank 6): 10.16,68.33 96.52,68.33 96.52,13.72 10.16,13.72
  pour Bottom (isolate 0.305): 10.16,68.33 96.52,68.33 96.52,13.72 10.16,13.72
GND1  (via drill 0.51)
  other vias: 141.6,27.43 115.57,26.67 112.52,31.75 113.54,22.61 144.02,22.86 148.46,47.5 148.34,30.86 148.34,23.62 135.38,42.55 129.03,44.96
  pour Top (isolate 0.305, rank 6): 100.33,68.33 186.69,68.33 186.69,13.72 100.33,13.72
  pour Bottom (isolate 0.305): 100.33,68.33 186.69,68.33 186.69,13.72 100.33,13.72
GND2  (via drill 0.51)
  other vias: 51.44,89.41 25.4,88.65 22.35,93.73 23.37,84.58 53.85,84.84 58.29,109.47 58.17,92.84 58.17,85.6 45.21,104.52 38.86,106.93
  pour Top (isolate 0.305, rank 6): 10.16,130.3 96.52,130.3 96.52,75.69 10.16,75.69
  pour Bottom (isolate 0.305): 10.16,130.3 96.52,130.3 96.52,75.69 10.16,75.69
GND3  (via drill 0.51)
  other vias: 141.6,89.41 115.57,88.65 112.52,93.73 113.54,84.58 144.02,84.84 148.46,109.47 148.34,92.84 148.34,85.6 135.38,104.52 129.03,106.93
  pour Top (isolate 0.305, rank 6): 100.33,130.3 186.69,130.3 186.69,75.69 100.33,75.69
  pour Bottom (isolate 0.305): 100.33,130.3 186.69,130.3 186.69,75.69 100.33,75.69
I2C2_SCL  (via drill 0.51)
  Top 0.203: 28.14,24.64 34.46,24.64 R11.1 35.18,25.61 U3.6 35.18,28.83 36.7,30.35 38,30.35 38.51,29.84 40.26,29.84 42.06,31.65 TPM1.2 47.98,31.65 v48.64,30.99 49.66,32 49.66,35.18 50.04,35.56 50.04,40.39 49.13,41.29 U2.28 49.13,43.96 v49.02,44.07 | AES1.6 v35.69,49.15 | U$2.P9.19 54.61,16.89 54.61,19.05 56.26,20.7 JP7.1
  Top 0.254: SHA1.6 22.48,59.82 v22.61,59.69 | ECC1.6 36.2,59.82 v36.32,59.69 | RTC1.8 28.14,24.64
  Bottom 0.203: v48.64,30.99 48.64,25.91 52.07,22.48 52.07,16.89 U$2.P9.19 | v36.32,59.69 36.83,59.18 36.83,56.9 35.69,55.75 v35.69,49.15 42.55,49.15 47.62,44.07 v49.02,44.07
  Bottom 0.254: v22.61,59.69 v36.32,59.69
I2C2_SCL1  (via drill 0.51)
  Top 0.203: 118.31,24.64 124.63,24.64 R15.1 125.35,25.61 U5.6 125.35,28.83 126.87,30.35 128.17,30.35 128.68,29.84 130.43,29.84 132.23,31.65 TPM2.2 138.15,31.65 v138.81,30.99 139.83,32 139.83,35.18 140.21,35.56 140.21,40.39 139.3,41.29 U4.28 139.3,43.96 v139.19,44.07 | AES2.6 v125.86,49.15 | U$1.P9.19 144.78,16.89 144.78,19.05 146.43,20.7 JP19.1
  Top 0.254: SHA2.6 112.65,59.82 v112.78,59.69 | ECC2.6 126.36,59.82 v126.49,59.69 | RTC2.8 118.31,24.64
  Bottom 0.203: v138.81,30.99 138.81,25.91 142.24,22.48 142.24,16.89 U$1.P9.19 | v126.49,59.69 127,59.18 127,56.9 125.86,55.75 v125.86,49.15 132.72,49.15 137.79,44.07 v139.19,44.07
  Bottom 0.254: v112.78,59.69 v126.49,59.69
I2C2_SCL2  (via drill 0.51)
  Top 0.203: 28.14,86.61 34.46,86.61 R24.1 35.18,87.59 U8.6 35.18,90.81 36.7,92.33 38,92.33 38.51,91.82 40.26,91.82 42.06,93.62 TPM3.2 47.98,93.62 v48.64,92.96 49.66,93.98 49.66,97.16 50.04,97.54 50.04,102.36 49.13,103.27 U7.28 49.13,105.94 v49.02,106.05 | AES3.6 v35.69,111.12 | U$11.P9.19 54.61,78.87 54.61,81.03 56.26,82.68 JP29.1
  Top 0.254: SHA3.6 22.48,121.79 v22.61,121.67 | ECC3.6 36.2,121.79 v36.32,121.67 | RTC3.8 28.14,86.61
  Bottom 0.203: v48.64,92.96 48.64,87.88 52.07,84.45 52.07,78.87 U$11.P9.19 | v36.32,121.67 36.83,121.16 36.83,118.87 35.69,117.73 v35.69,111.12 42.55,111.12 47.62,106.05 v49.02,106.05
  Bottom 0.254: v22.61,121.67 v36.32,121.67
I2C2_SCL3  (via drill 0.51)
  Top 0.203: 118.31,86.61 124.63,86.61 R33.1 125.35,87.59 U11.6 125.35,90.81 126.87,92.33 128.17,92.33 128.68,91.82 130.43,91.82 132.23,93.62 TPM4.2 138.15,93.62 v138.81,92.96 139.83,93.98 139.83,97.16 140.21,97.54 140.21,102.36 139.3,103.27 U10.28 139.3,105.94 v139.19,106.05 | AES4.6 v125.86,111.12 | U$16.P9.19 144.78,78.87 144.78,81.03 146.43,82.68 JP39.1
  Top 0.254: SHA4.6 112.65,121.79 v112.78,121.67 | ECC4.6 126.36,121.79 v126.49,121.67 | RTC4.8 118.31,86.61
  Bottom 0.203: v138.81,92.96 138.81,87.88 142.24,84.45 142.24,78.87 U$16.P9.19 | v126.49,121.67 127,121.16 127,118.87 125.86,117.73 v125.86,111.12 132.72,111.12 137.79,106.05 v139.19,106.05
  Bottom 0.254: v112.78,121.67 v126.49,121.67
I2C2_SDA  (via drill 0.51)
  Top 0.203: RTC1.7 26.8,25.53 27.43,26.16 28.57,26.16 29.46,25.27 33.31,25.27 R10.1 | U3.5 33.91,28.83 35.94,30.86 38.23,30.86 38.73,30.35 40.01,30.35 41.96,32.31 TPM1.1 48.56,32.31 v48.64,32.38 49.15,32.89 49.15,35.43 49.53,35.81 49.53,40.13 48.33,41.33 U2.27 48.33,43.36 48.01,43.69 v48.01,45.09 | AES1.5 36.45,50.42 v36.83,50.04 | U$2.P9.20 53.34,18.54 56.13,21.34 61.59,21.34 JP7.2
  Top 0.254: U3.5 33.91,25.87 R10.1 | SHA1.5 22.48,61.09 v22.61,61.21 | ECC1.5 36.2,61.09 v36.32,61.21
  Bottom 0.203: v48.64,32.38 49.53,31.5 49.53,25.78 53.34,21.97 U$2.P9.20 | v36.32,61.21 37.34,60.2 37.34,56.64 36.83,56.13 v36.83,50.04 37.21,49.66 42.8,49.66 47.37,45.09 v48.01,45.09
  Bottom 0.254: v22.61,61.21 v36.32,61.21
I2C2_SDA1  (via drill 0.51)
  Top 0.203: RTC2.7 116.97,25.53 117.6,26.16 118.75,26.16 119.63,25.27 123.48,25.27 R14.1 | U5.5 124.08,28.83 126.11,30.86 128.4,30.86 128.91,30.35 130.18,30.35 132.13,32.31 TPM2.1 138.74,32.31 v138.81,32.38 139.32,32.89 139.32,35.43 139.7,35.81 139.7,40.13 138.5,41.33 U4.27 138.5,43.36 138.18,43.69 v138.18,45.09 | AES2.5 126.62,50.42 v127,50.04 | U$1.P9.20 143.51,18.54 146.3,21.34 151.76,21.34 JP19.2
  Top 0.254: U5.5 124.08,25.87 R14.1 | SHA2.5 112.65,61.09 v112.78,61.21 | ECC2.5 126.36,61.09 v126.49,61.21
  Bottom 0.203: v138.81,32.38 139.7,31.5 139.7,25.78 143.51,21.97 U$1.P9.20 | v126.49,61.21 127.51,60.2 127.51,56.64 127,56.13 v127,50.04 127.38,49.66 132.97,49.66 137.54,45.09 v138.18,45.09
  Bottom 0.254: v112.78,61.21 v126.49,61.21
I2C2_SDA2  (via drill 0.51)
  Top 0.203: RTC3.7 26.8,87.5 27.43,88.14 28.57,88.14 29.46,87.25 33.31,87.25 R23.1 | U8.5 33.91,90.81 35.94,92.84 38.23,92.84 38.73,92.33 40.01,92.33 41.96,94.28 TPM3.1 48.56,94.28 v48.64,94.36 49.15,94.87 49.15,97.41 49.53,97.79 49.53,102.11 48.33,103.31 U7.27 48.33,105.34 48.01,105.66 v48.01,107.06 | AES3.5 36.45,112.39 v36.83,112.01 | U$11.P9.20 53.34,80.52 56.13,83.31 61.59,83.31 JP29.2
  Top 0.254: U8.5 33.91,87.84 R23.1 | SHA3.5 22.48,123.06 v22.61,123.19 | ECC3.5 36.2,123.06 v36.32,123.19
  Bottom 0.203: v48.64,94.36 49.53,93.47 49.53,87.76 53.34,83.95 U$11.P9.20 | v36.32,123.19 37.34,122.17 37.34,118.62 36.83,118.11 v36.83,112.01 37.21,111.63 42.8,111.63 47.37,107.06 v48.01,107.06
  Bottom 0.254: v22.61,123.19 v36.32,123.19
I2C2_SDA3  (via drill 0.51)
  Top 0.203: RTC4.7 116.97,87.5 117.6,88.14 118.75,88.14 119.63,87.25 123.48,87.25 R32.1 | U11.5 124.08,90.81 126.11,92.84 128.4,92.84 128.91,92.33 130.18,92.33 132.13,94.28 TPM4.1 138.74,94.28 v138.81,94.36 139.32,94.87 139.32,97.41 139.7,97.79 139.7,102.11 138.5,103.31 U10.27 138.5,105.34 138.18,105.66 v138.18,107.06 | AES4.5 126.62,112.39 v127,112.01 | U$16.P9.20 143.51,80.52 146.3,83.31 151.76,83.31 JP39.2
  Top 0.254: U11.5 124.08,87.84 R32.1 | SHA4.5 112.65,123.06 v112.78,123.19 | ECC4.5 126.36,123.06 v126.49,123.19
  Bottom 0.203: v138.81,94.36 139.7,93.47 139.7,87.76 143.51,83.95 U$16.P9.20 | v126.49,123.19 127.51,122.17 127.51,118.62 127,118.11 v127,112.01 127.38,111.63 132.97,111.63 137.54,107.06 v138.18,107.06
  Bottom 0.254: v112.78,123.19 v126.49,123.19
MISO
  Top 0.203: U2.16 46.73,53.33 J1.1
MISO1
  Top 0.203: U4.16 136.9,53.33 J2.1
MISO2
  Top 0.203: U7.16 46.73,115.31 J3.1
MISO3
  Top 0.203: U10.16 136.9,115.31 J4.1
MOSI
  Top 0.203: U2.15 47.53,53.12 47.75,53.34 49.02,53.34 49.78,54.1 49.78,55.63 49.28,56.13 46.99,56.13 J1.4
MOSI1
  Top 0.203: U4.15 137.7,53.12 137.92,53.34 139.19,53.34 139.95,54.1 139.95,55.63 139.45,56.13 137.16,56.13 J2.4
MOSI2
  Top 0.203: U7.15 47.53,115.09 47.75,115.32 49.02,115.32 49.78,116.08 49.78,117.6 49.28,118.11 46.99,118.11 J3.4
MOSI3
  Top 0.203: U10.15 137.7,115.09 137.92,115.32 139.19,115.32 139.95,116.08 139.95,117.6 139.45,118.11 137.16,118.11 J4.4
N$1
  Top 0.254: U3.7 36.45,26.29 JP13.1 37.34,24.38 R12.1
N$4
  Top 0.203: U2.7 54.64,48.74 55.43,47.95 Y2.1
N$5
  Top 0.203: U2.8 54.62,49.54 55.43,50.35 Y2.3
N$6  (via drill 1 pad 1.91)
  other vias: 63.5,61.34
N$12
  Top 0.203: R2.1 52.35,59.14 D1.A
N$18
  Top 0.254: U3.3 35.18,34.84 arc-90 R7.1
N$19
  Top 0.203: TPM1.27 53.62,31.65 54.1,32.13 55.79,32.13 R6.1
N$20
  Top 0.254: JP2.1 36.83,35.47 R8.1 36.45,34.25 U3.2
N$21
  Top 0.203: JP1.1 38.92,36.63 38.1,35.81 38.1,34.42 37.72,34.04 U3.1 37.72,32 38.77,32 R9.1
N$22
  Top 0.254: SJ1.3 33.73,23.59 R10.2
N$23
  Top 0.254: R11.2 35.31,21.89 SJ1.1
N$24  (via drill 1 pad 1.91)
  other vias: 91.44,56.26
N$26  (via drill 1 pad 1.91)
  other vias: 91.44,51.18
N$27
  Top 0.203: U4.7 144.81,48.74 145.6,47.95 Y1.1
N$28
  Top 0.203: U4.8 144.79,49.54 145.6,50.35 Y1.3
N$29
  Top 0.203: TPM2.27 143.79,31.65 144.27,32.13 145.96,32.13 R3.1
N$30
  Top 0.254: U5.3 125.35,34.84 arc-90 R4.1
N$31
  Top 0.254: JP9.1 127,35.47 R5.1 126.62,34.25 U5.2
N$32
  Top 0.203: JP10.1 129.09,36.63 128.27,35.81 128.27,34.42 127.89,34.04 U5.1 127.89,32 128.94,32 R13.1
N$35
  Top 0.254: SJ2.3 123.9,23.59 R14.2
N$39  (via drill 1 pad 1.91)
  other vias: 66.04,61.34
N$40  (via drill 1 pad 1.91)
  other vias: 68.58,61.34
N$43  (via drill 1 pad 1.91)
  other vias: 71.12,61.34
N$45  (via drill 1 pad 1.91)
  other vias: 73.66,61.34
N$47  (via drill 1 pad 1.91)
  other vias: 76.2,61.34
N$50  (via drill 1 pad 1.91)
  other vias: 78.74,61.34
N$51  (via drill 1 pad 1.91)
  other vias: 81.28,61.34
N$52  (via drill 1 pad 1.91)
  other vias: 83.82,61.34
N$53  (via drill 1 pad 1.91)
  other vias: 86.36,61.34
N$54
  Top 0.254: R15.2 125.48,21.89 SJ2.1
N$55
  Top 0.254: U5.7 126.62,26.29 JP15.1 127.51,24.38 R16.1
N$56  (via drill 1 pad 1.91)
  other vias: 153.67,61.34
N$57  (via drill 1 pad 1.91)
  other vias: 63.5,58.8
N$58  (via drill 1 pad 1.91)
  other vias: 66.04,58.8
N$59  (via drill 1 pad 1.91)
  other vias: 68.58,58.8
N$60  (via drill 1 pad 1.91)
  other vias: 71.12,58.8
N$61  (via drill 1 pad 1.91)
  other vias: 73.66,58.8
N$62  (via drill 1 pad 1.91)
  other vias: 76.2,58.8
N$63  (via drill 1 pad 1.91)
  other vias: 78.74,58.8
N$64  (via drill 1 pad 1.91)
  other vias: 81.28,58.8
N$65  (via drill 1 pad 1.91)
  other vias: 83.82,58.8
N$66  (via drill 1 pad 1.91)
  other vias: 86.36,58.8